# Allegro board PMOD2BNC.brd
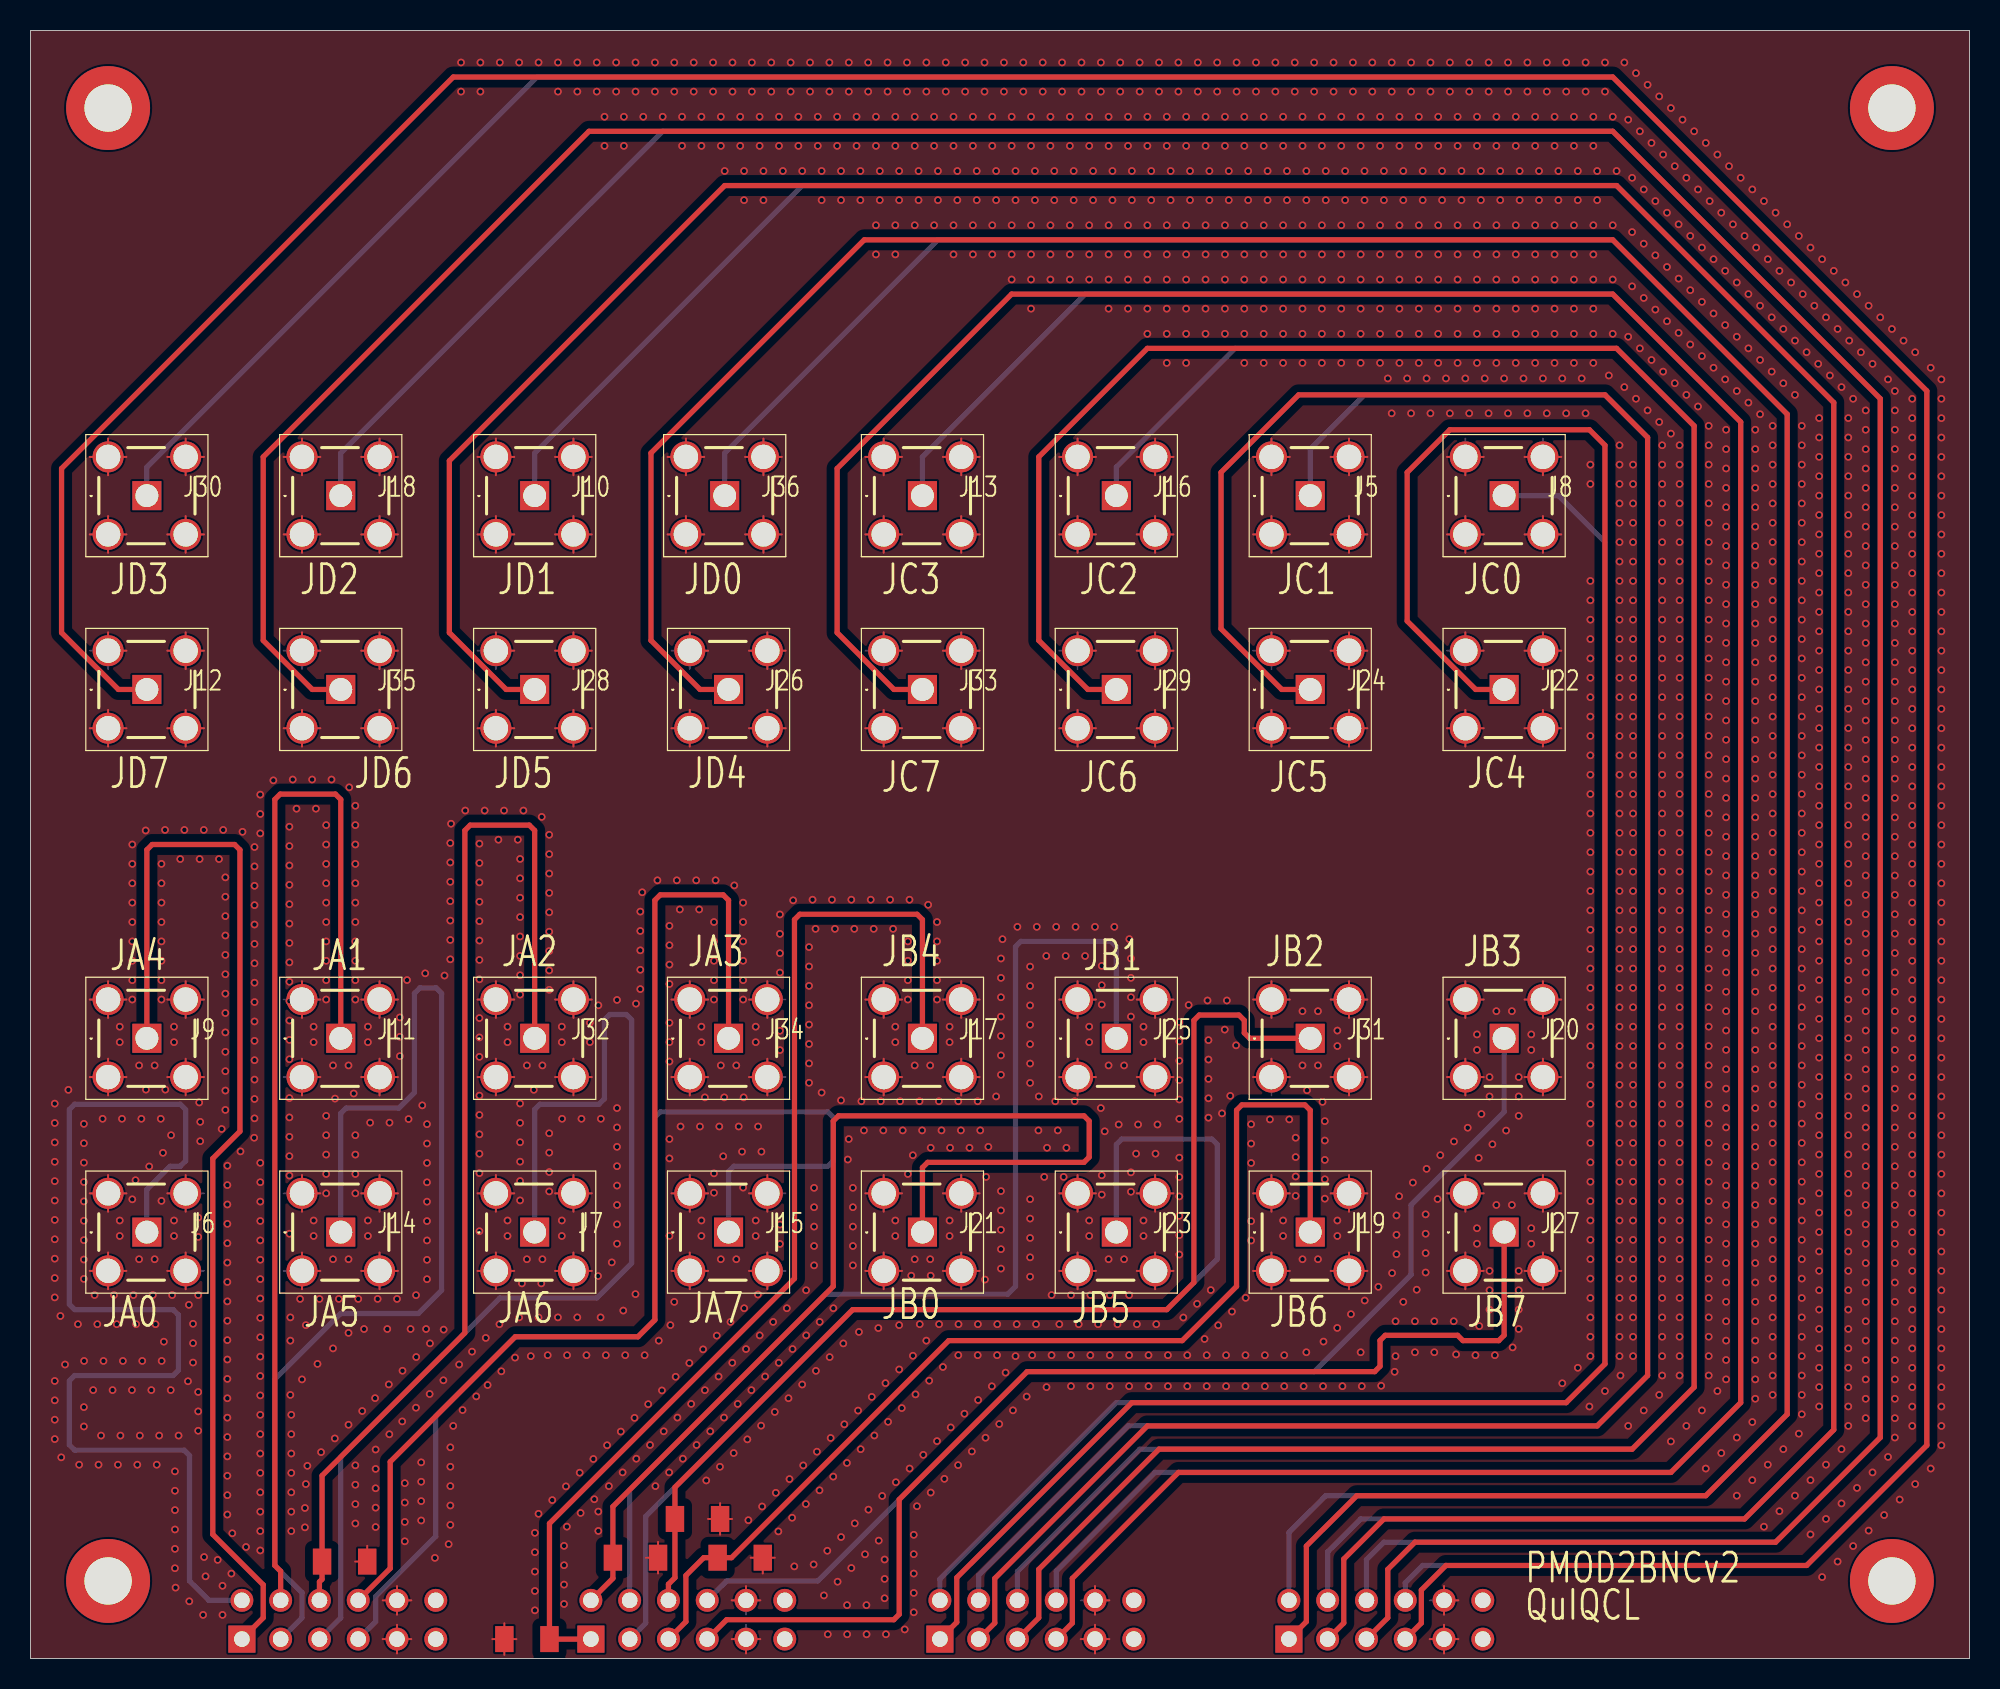
[diagram p0: board, top side]
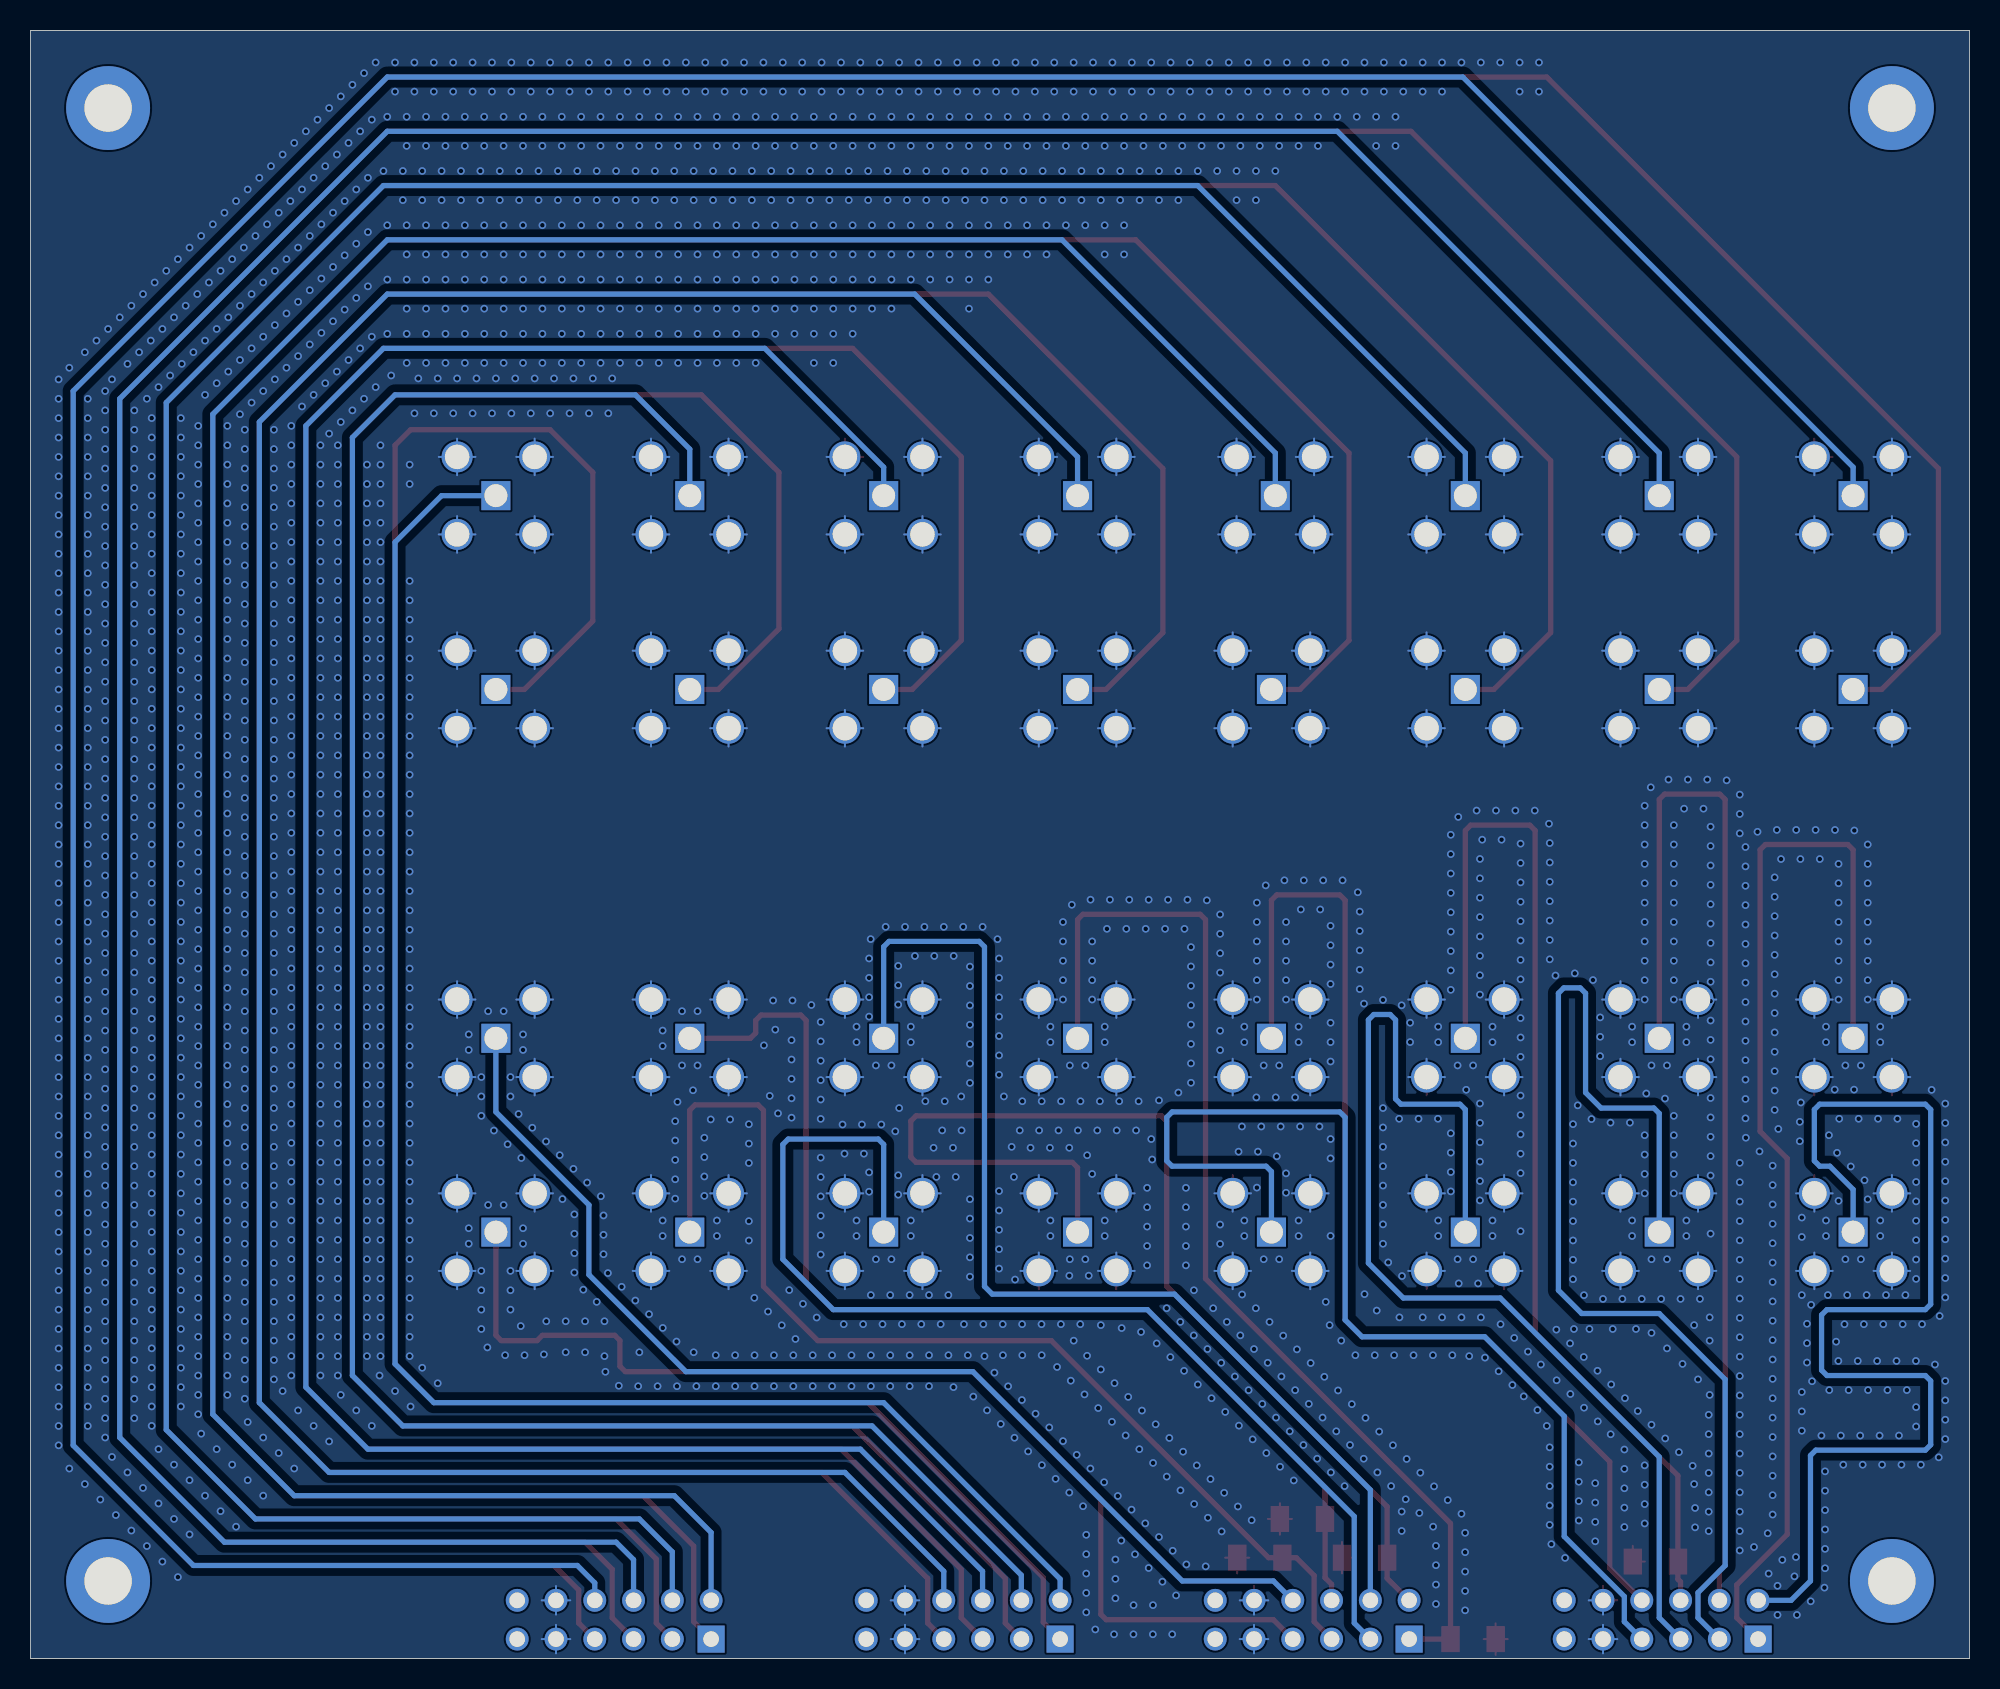
[diagram p1: board, bottom side, seen from below]

Outline 127 x 106.68 mm; copper layers: TOP, LAYER_1, LAYER_2, BOTTOM. Coordinates in mm from the lower left corner of the outline.
Outline path: 0,106.68 127,106.68 127,0 0,0 0,106.68

## Design rules (mm)
constraint set DEFAULT: min track width 0.127
net group IMPORTANT: nets JA_0 JA_1 JA_2 JA_3 JA_4 JA_5 JA_6 JA_7 JB_0 JB_1 JB_2 JB_3 JB_4 JB_5 JB_6 JB_7

## Placement (name value [footprint] x y rotation side)
J1  -  [PZ254R-12-12P]  20.19 2.54 0 top
J2  -  [PZ254R-12-12P]  65.91 2.54 0 top
J3  -  [PZ254R-12-12P]  43.05 2.54 0 top
J4  -  [PZ254R-12-12P]  88.77 2.54 0 top
J5  -  [SMA-KE-10]  83.82 76.2 0 top
J6  -  [SMA-KE-10]  7.62 27.94 0 top
J7  -  [SMA-KE-10]  33.02 27.94 0 top
J8  -  [SMA-KE-10]  96.52 76.2 0 top
J9  -  [SMA-KE-10]  7.62 40.64 0 top
J10  -  [SMA-KE-10]  33.02 76.2 0 top
J11  -  [SMA-KE-10]  20.32 40.64 0 top
J12  -  [SMA-KE-10]  7.62 63.5 0 top
J13  -  [SMA-KE-10]  58.42 76.2 0 top
J14  -  [SMA-KE-10]  20.32 27.94 0 top
J15  -  [SMA-KE-10]  45.72 27.94 0 top
J16  -  [SMA-KE-10]  71.12 76.2 0 top
J17  -  [SMA-KE-10]  58.42 40.64 0 top
J18  -  [SMA-KE-10]  20.32 76.2 0 top
J19  -  [SMA-KE-10]  83.82 27.94 0 top
J20  -  [SMA-KE-10]  96.52 40.64 0 top
J21  -  [SMA-KE-10]  58.42 27.94 0 top
J22  -  [SMA-KE-10]  96.52 63.5 0 top
J23  -  [SMA-KE-10]  71.12 27.94 0 top
J24  -  [SMA-KE-10]  83.82 63.5 0 top
J25  -  [SMA-KE-10]  71.12 40.64 0 top
J26  -  [SMA-KE-10]  45.72 63.5 0 top
J27  -  [SMA-KE-10]  96.52 27.94 0 top
J28  -  [SMA-KE-10]  33.02 63.5 0 top
J29  -  [SMA-KE-10]  71.12 63.5 0 top
J30  -  [SMA-KE-10]  7.62 76.2 0 top
J31  -  [SMA-KE-10]  83.82 40.64 0 top
J32  -  [SMA-KE-10]  33.02 40.64 0 top
J33  -  [SMA-KE-10]  58.42 63.5 0 top
J34  -  [SMA-KE-10]  45.72 40.64 0 top
J35  -  [SMA-KE-10]  20.32 63.5 0 top
J36  -  [SMA-KE-10]  45.47 76.2 0 top
NOREF  -  [unnamed]  121.92 101.6 0 top
NOREF#2  -  [unnamed]  5.08 101.6 0 top
NOREF#3  -  [unnamed]  5.08 5.08 0 top
NOREF#4  -  [unnamed]  121.92 5.08 0 top
R1  -  [ARG06BTC49R9]  20.57 6.35 0 top
R2  -  [ARG06BTC49R9]  32.51 1.27 180 top
R3  -  [ARG06BTC49R9]  39.62 6.6 0 top
R4  -  [ARG06BTC49R9]  46.48 6.6 0 top
R5  -  [ARG06BTC49R9]  43.69 9.14 0 top

## Library data of the parts
J1-J4 = PZ254R-12-12P
J5-J36 = SMA-KE-10
R1-R5 = ARG06BTC49R9_0

## Footprints (pads in the part's own frame, mm; a bottom-side part is the same pattern mirrored in y, then rotated)
ARG06BTC49R9
  rect 1.206x1.702 smd: 1(1.478,0) 2(-1.478,0)
PZ254R-12-12P
  rect 1.778x1.778 hole 1.021: 1(-6.35,-1.27)
  round 1.501 hole 1.021: 2(-6.35,1.27) 3(-3.81,-1.27) 4(-3.81,1.27) 5(-1.27,-1.27) 6(-1.27,1.27) 7(1.27,-1.27) 8(1.27,1.27) 9(3.81,-1.27) 10(3.81,1.27) 11(6.35,-1.27) 12(6.35,1.27)
SMA-KE-10
  round 2.032 hole 1.6: 1(2.54,2.54) 2(-2.54,2.54) 3(-2.54,-2.54) 4(2.54,-2.54)
  rect 1.905x1.905 hole 1.501: 5(0,0)
unnamed
  round 5.499 hole 3.099 unplated: (0,0)

## Nets
GND: J1.9 J1.10 J2.9 J2.10 J3.9 J3.10 J4.9 J4.10 J5.1 J5.2 J5.3 J5.4 J6.1 J6.2 J6.3 J6.4 J7.1 J7.2 J7.3 J7.4 J8.1 J8.2 J8.3 J8.4 J9.1 J9.2 J9.3 J9.4 J10.1 J10.2 J10.3 J10.4 J11.1 J11.2 J11.3 J11.4 J12.1 J12.2 J12.3 J12.4 J13.1 J13.2 J13.3 J13.4 J14.1 J14.2 J14.3 J14.4 J15.1 J15.2 J15.3 J15.4 J16.1 J16.2 J16.3 J16.4 J17.1 J17.2 J17.3 J17.4 J18.1 J18.2 J18.3 J18.4 J19.1 J19.2 J19.3 J19.4 J20.1 J20.2 J20.3 J20.4 J21.1 J21.2 J21.3 J21.4 J22.1 J22.2 J22.3 J22.4 J23.1 J23.2 J23.3 J23.4 J24.1 J24.2 J24.3 J24.4 J25.1 J25.2 J25.3 J25.4 J26.1 J26.2 J26.3 J26.4 J27.1 J27.2 J27.3 J27.4 J28.1 J28.2 J28.3 J28.4 J29.1 J29.2 J29.3 J29.4 J30.1 J30.2 J30.3 J30.4 J31.1 J31.2 J31.3 J31.4 J32.1 J32.2 J32.3 J32.4 J33.1 J33.2 J33.3 J33.4 J34.1 J34.2 J34.3 J34.4 J35.1 J35.2 J35.3 J35.4 J36.1 J36.2 J36.3 J36.4 R1.1 R2.1 R3.1 R4.1 R5.1
JA_0: J1.2 J6.5(IO)
JA_1: J1.4 J11.5(IO)
JA_2: J1.6 J32.5(IO) R1.2
JA_3: J1.8 J34.5(IO)
JA_4: J1.1 J9.5(IO)
JA_5: J1.3 J14.5(IO)
JA_6: J1.5 J7.5(IO)
JA_7: J1.7 J15.5(IO)
JB_0: J3.2 J21.5(IO) R3.2
JB_1: J3.4 J25.5(IO)
JB_2: J3.6 J31.5(IO) R5.2
JB_3: J3.8 J20.5(IO)
JB_4: J3.1 J17.5(IO) R2.2
JB_5: J3.3 J23.5(IO)
JB_6: J3.5 J19.5(IO) R4.2
JB_7: J3.7 J27.5(IO)
JC_0: J2.2 J8.5(IO)
JC_1: J2.4 J5.5(IO)
JC_2: J2.6 J16.5(IO)
JC_3: J2.8 J13.5(IO)
JC_4: J2.1 J22.5(IO)
JC_5: J2.3 J24.5(IO)
JC_6: J2.5 J29.5(IO)
JC_7: J2.7 J33.5(IO)
JD_0: J4.2 J36.5(IO)
JD_1: J4.4 J10.5(IO)
JD_2: J4.6 J18.5(IO)
JD_3: J4.8 J30.5(IO)
JD_4: J4.1 J26.5(IO)
JD_5: J4.3 J28.5(IO)
JD_6: J4.5 J35.5(IO)
JD_7: J4.7 J12.5(IO)

Pads without a net: J1 11 12; J2 11 12; J3 11 12; J4 11 12

## Via types
v1: diameter 0.5, hole 0.3, TOP to BOTTOM, 2518 vias

## Routing (per net, layer and track width the routed paths; a pad name or vN(x,y) marks a point on that pad's centre or on a via; arc(x,y) is an arc through that point)
GND: length 2532.6
  TOP w0.127: 55.88,41.98 J17.2 ; J17.2 54.68,43.18 ; J17.2 55.88,44.38 ; J17.2 57.08,43.18 ; 45.93,1.27 J3.9 ; J3.9 47.8,1.27 ; J3.9 46.86,0.34 ; 93.98,41.98 J20.2 ; J20.2 92.78,43.18 ; J20.2 93.98,44.38 ; J20.2 95.18,43.18 ; 55.88,29.28 J21.2 ; J21.2 54.68,30.48 ; J21.2 57.08,30.48 ; J21.2 55.88,31.68 ; 55.88,36.9 J17.3 ; J17.3 55.88,39.3 ; J17.3 54.68,38.1 ; J17.3 57.08,38.1 ; 59.76,38.1 J17.4 ; J17.4 62.16,38.1 ; J17.4 60.96,36.9 ; J17.4 60.96,39.3 ; 92.78,25.4 J27.3 ; J27.3 93.98,24.2 ; J27.3 95.18,25.4 ; J27.3 93.98,26.6 ; 67.38,60.96 J29.3 ; J29.3 68.58,59.76 ; J29.3 68.58,62.16 ; J29.3 69.78,60.96 ; J8.1 100.26,78.74 ; J8.1 99.06,77.54 ; J8.1 97.86,78.74 ; 97.86,25.4 J27.4 ; J27.4 99.06,24.2 ; J27.4 99.06,26.6 ; J27.4 100.26,25.4 ; 47.06,66.04 J26.1 ; J26.1 49.46,66.04 ; J26.1 48.26,67.24 ; J26.1 48.26,64.84 ; J7.3 31.68,25.4 ; J7.3 29.28,25.4 ; J7.3 30.48,26.6 ; J7.3 30.48,24.2 ; J32.1 35.56,44.38 ; J32.1 34.36,43.18 ; J32.1 36.76,43.18 ; J32.1 35.56,41.98 ; J7.2 30.48,31.68 ; J7.2 29.28,30.48 ; J7.2 30.48,29.28 ; J7.2 31.68,30.48 ; 54.68,73.66 J13.3 ; J13.3 57.08,73.66 ; J13.3 55.88,72.46 ; J13.3 55.88,74.86 ; 97.86,60.96 J22.4 ; J22.4 99.06,62.16 ; J22.4 99.06,59.76 ; J22.4 100.26,60.96 ; J18.1 24.06,78.74 ; J18.1 22.86,79.94 ; J18.1 21.66,78.74 ; J18.1 22.86,77.54 ; 10.16,64.84 J12.1 ; J12.1 10.16,67.24 ; J12.1 8.96,66.04 ; J12.1 11.36,66.04 ; 29.28,38.1 J32.3 ; J32.3 31.68,38.1 ; J32.3 30.48,36.9 ; J32.3 30.48,39.3 ; J12.4 10.16,62.16 ; J12.4 8.96,60.96 ; J12.4 11.36,60.96 ; J12.4 10.16,59.76 ; 29.28,43.18 J32.2 ; J32.2 30.48,44.38 ; J32.2 30.48,41.98 ; J32.2 31.68,43.18 ; 41.98,25.4 J15.3 ; J15.3 43.18,26.6 ; J15.3 43.18,24.2 ; J15.3 44.38,25.4 ; 72.46,78.74 J16.1 ; J16.1 73.66,77.54 ; J16.1 74.86,78.74 ; J16.1 73.66,79.94 ; J35.3 17.78,62.16 ; J35.3 16.58,60.96 ; J35.3 17.78,59.76 ; J35.3 18.98,60.96 ; J15.2 43.18,31.68 ; J15.2 41.98,30.48 ; J15.2 43.18,29.28 ; J15.2 44.38,30.48 ; 81.28,77.54 J5.2 ; J5.2 81.28,79.94 ; J5.2 80.08,78.74 ; J5.2 82.48,78.74 ; J4.10 92.58,4.74 ; J4.10 92.58,2.88 ; J4.10 93.52,3.81 ; 92.78,73.66 J8.3 ; J8.3 93.98,72.46 ; J8.3 95.18,73.66 ; J8.3 93.98,74.86 ; 18.98,66.04 J35.2 17.78,67.24 ; 35.56,59.76 J28.4 ; J28.4 36.76,60.96 ; J28.4 35.56,62.16 ; J28.4 34.36,60.96 ; J9.4 10.16,39.3 ; J9.4 8.96,38.1 ; J9.4 11.36,38.1 ; J9.4 10.16,36.9 ; J29.1 74.86,66.04 ; J29.1 72.46,66.04 ; J29.1 73.66,67.24 ; J29.1 73.66,64.84 ; 86.36,36.9 J31.4 ; J31.4 87.56,38.1 ; J31.4 86.36,39.3 ; J31.4 85.16,38.1 ; J27.2 93.98,31.68 ; J27.2 92.78,30.48 ; J27.2 93.98,29.28 ; J27.2 95.18,30.48 ; 86.36,77.54 J5.1 ; J5.1 87.56,78.74 ; J5.1 85.16,78.74 ; J5.1 86.36,79.94 ; 72.46,38.1 J25.4 ; J25.4 73.66,36.9 ; J25.4 74.86,38.1 ; J25.4 73.66,39.3 ; 48.01,72.46 J36.4 ; J36.4 49.2,73.66 ; J36.4 48.01,74.86 ; J36.4 46.81,73.66 ; J25.1 73.66,44.38 ; J25.1 73.66,41.98 ; J25.1 74.86,43.18 ; J25.1 72.46,43.18 ; J23.3 69.78,25.4 ; J23.3 68.58,24.2 ; J23.3 67.38,25.4 ; J23.3 68.58,26.6 ; 21.66,30.48 J14.1 ; J14.1 22.86,31.68 ; J14.1 24.06,30.48 ; J14.1 22.86,29.28 ; J19.3 82.48,25.4 ; J19.3 81.28,26.6 ; J19.3 81.28,24.2 ; J19.3 80.08,25.4 ; J26.4 48.26,62.16 ; J26.4 49.46,60.96 ; J26.4 48.26,59.76 ; J26.4 47.06,60.96 ; 59.76,66.04 J33.1 ; J33.1 62.16,66.04 ; J33.1 60.96,67.24 ; J33.1 60.96,64.84 ; J1.10 24,4.74 ; J1.10 24.94,3.81 ; J1.10 24,2.88 ; J1.10 23.07,3.81 ; J8.2 95.18,78.74 ; J8.2 92.78,78.74 ; J8.2 93.98,77.54 ; 67.38,38.1 J25.3 ; J25.3 69.78,38.1 ; J25.3 68.58,39.3 ; J25.3 68.58,36.9 ; 41.98,38.1 J34.3 ; J34.3 43.18,36.9 ; J34.3 44.38,38.1 ; J34.3 43.18,39.3 ; 44.38,66.04 J26.2 43.18,67.24 ; 60.96,77.54 J13.1 ; J13.1 59.76,78.74 ; J13.1 62.16,78.74 ; J13.1 60.96,79.94 ; J10.2 31.68,78.74 ; J10.2 30.48,79.94 ; J10.2 29.28,78.74 ; J10.2 30.48,77.54 ; J25.2 69.78,43.18 ; J25.2 68.58,44.38 ; J25.2 68.58,41.98 ; J25.2 67.38,43.18 ; J29.4 73.66,62.16 ; J29.4 72.46,60.96 ; J29.4 73.66,59.76 ; J29.4 74.86,60.96 ; J21.1 60.96,31.68 ; J21.1 60.96,29.28 ; J21.1 59.76,30.48 ; J21.1 62.16,30.48 ; 72.46,30.48 J23.1 ; J23.1 73.66,31.68 ; J23.1 74.86,30.48 ; J23.1 73.66,29.28 ; 35.56,77.54 J10.1 ; J10.1 35.56,79.94 ; J10.1 36.76,78.74 ; J10.1 34.36,78.74 ; J31.1 86.36,44.38 ; J31.1 85.16,43.18 ; J31.1 87.56,43.18 ; J31.1 86.36,41.98 ; J11.4 22.86,39.3 ; J11.4 22.86,36.9 ; J11.4 24.06,38.1 ; J11.4 21.66,38.1 ; 8.96,30.48 J6.1 ; J6.1 10.16,29.28 ; J6.1 10.16,31.68 ; 17.78,29.28 J14.2 ; J14.2 17.78,31.68 ; J14.2 18.98,30.48 ; J30.2 5.08,79.94 ; J30.2 5.08,77.54 ; J30.2 3.88,78.74 ; J30.2 6.28,78.74 ; 21.66,43.18 J11.1 ; J11.1 22.86,41.98 ; J11.1 24.06,43.18 ; J11.1 22.86,44.38 ; J11.3 18.98,38.1 ; J11.3 17.78,39.3 ; J11.3 17.78,36.9 ; 17.78,72.46 J18.3 ; J18.3 17.78,74.86 ; J18.3 16.58,73.66 ; J18.3 18.98,73.66 ; R5.1 45.17,10.18 ; R5.1 45.95,9.14 ; R5.1 45.17,8.11 ; R5.1 44.38,9.14 ; 41.73,78.74 J36.2 ; J36.2 44.12,78.74 ; J36.2 42.93,77.54 ; J36.2 42.93,79.94 ; J32.4 35.56,39.3 ; J32.4 34.36,38.1 ; J32.4 36.76,38.1 ; J32.4 35.56,36.9 ; J30.3 5.08,74.86 ; J30.3 6.28,73.66 ; J30.3 5.08,72.46 ; J30.3 3.88,73.66 ; 29.28,60.96 J28.3 ; J28.3 30.48,59.76 ; J28.3 30.48,62.16 ; J28.3 31.68,60.96 ; 8.96,73.66 J30.4 ; J30.4 10.16,74.86 ; J30.4 10.16,72.46 ; J30.4 11.36,73.66 ; 80.08,43.18 J31.2 ; J31.2 81.28,41.98 ; J31.2 82.48,43.18 ; J31.2 81.28,44.38 ; J10.3 31.68,73.66 ; J10.3 29.28,73.66 ; J10.3 30.48,72.46 ; J10.3 30.48,74.86 ; J23.4 73.66,26.6 ; J23.4 73.66,24.2 ; J23.4 74.86,25.4 ; J23.4 72.46,25.4 ; J22.3 95.18,60.96 ; J22.3 92.78,60.96 ; J22.3 93.98,59.76 ; J22.3 93.98,62.16 ; 41.98,60.96 J26.3 ; J26.3 44.38,60.96 ; J26.3 43.18,59.76 ; J26.3 43.18,62.16 ; 21.66,73.66 J18.4 ; J18.4 24.06,73.66 ; J18.4 22.86,74.86 ; J18.4 22.86,72.46 ; J34.1 48.26,44.38 ; J34.1 47.06,43.18 ; J34.1 48.26,41.98 ; 3.88,43.18 J9.2 ; J9.2 5.08,44.38 ; J9.2 6.28,43.18 ; J9.2 5.08,41.98 ; J19.2 82.48,30.48 ; J19.2 81.28,29.28 ; J19.2 81.28,31.68 ; J19.2 80.08,30.48 ; J13.4 60.96,74.86 ; J13.4 60.96,72.46 ; J13.4 62.16,73.66 ; J13.4 59.76,73.66 ; 68.58,77.54 J16.2 ; J16.2 67.38,78.74 ; J16.2 69.78,78.74 ; J16.2 68.58,79.94 ; J33.4 62.16,60.96 ; J33.4 60.96,59.76 ; J33.4 59.76,60.96 ; J33.4 60.96,62.16 ; J6.2 5.08,31.68 ; J6.2 3.88,30.48 ; J6.2 5.08,29.28 ; J6.2 6.28,30.48 ; J14.3 18.98,25.4 ; J14.3 17.78,24.2 ; J14.3 17.78,26.6 ; J4.9 93.52,1.27 ; J4.9 91.65,1.27 ; J4.9 92.58,2.2 ; J4.9 92.58,0.34 ; J10.4 35.56,74.86 ; J10.4 36.76,73.66 ; J10.4 35.56,72.46 ; J10.4 34.36,73.66 ; J1.9 24,2.2 ; J1.9 23.07,1.27 ; J1.9 24.94,1.27 ; J1.9 24,0.34 ; J27.1 100.26,30.48 ; J27.1 99.06,31.68 ; J27.1 97.86,30.48 ; J27.1 99.06,29.28 ; 10.16,41.98 J9.1 ; J9.1 8.96,43.18 ; J9.1 10.16,44.38 ; J9.1 11.36,43.18 ; 47.06,25.4 J15.4 ; J15.4 48.26,26.6 ; J15.4 48.26,24.2 ; 99.06,72.46 J8.4 ; J8.4 99.06,74.86 ; J8.4 97.86,73.66 ; J8.4 100.26,73.66 ; 85.16,73.66 J5.4 ; J5.4 86.36,72.46 ; J5.4 87.56,73.66 ; J5.4 86.36,74.86 ; 21.66,66.04 J35.1 ; J35.1 24.06,66.04 ; J35.1 22.86,64.84 ; J35.1 22.86,67.24 ; J5.3 82.48,73.66 ; J5.3 80.08,73.66 ; J5.3 81.28,72.46 ; J5.3 81.28,74.86 ; 99.06,41.98 J20.1 ; J20.1 99.06,44.38 ; J20.1 100.26,43.18 ; J20.1 97.86,43.18 ; J2.9 69.72,2.2 ; J2.9 70.66,1.27 ; J2.9 68.79,1.27 ; J2.9 69.72,0.34 ; 54.68,78.74 J13.2 ; J13.2 55.88,79.94 ; J13.2 57.08,78.74 ; J13.2 55.88,77.54 ; 55.88,24.2 J21.3 ; J21.3 55.88,26.6 ; J21.3 54.68,25.4 ; J21.3 57.08,25.4 ; 22.05,7.38 R1.1 21.26,6.35 ; J19.1 86.36,31.68 ; J19.1 87.56,30.48 ; J19.1 86.36,29.28 ; J19.1 85.16,30.48 ; 48.26,36.9 J34.4 ; J34.4 48.26,39.3 ; J34.4 47.06,38.1 ; 68.58,72.46 J16.3 ; J16.3 69.78,73.66 ; J16.3 68.58,74.86 ; J16.3 67.38,73.66 ; R2.1 31.03,2.3 ; R2.1 31.03,0.24 ; R2.1 31.82,1.27 ; R2.1 30.25,1.27 ; 93.98,67.24 J22.2 95.18,66.04 ; 34.36,30.48 J7.1 ; J7.1 35.56,31.68 ; J7.1 36.76,30.48 ; J7.1 35.56,29.28 ; J36.3 42.93,74.86 ; J36.3 41.73,73.66 ; J36.3 44.12,73.66 ; J36.3 42.93,72.46 ; 48.26,29.28 J15.1 ; J15.1 48.26,31.68 ; J15.1 47.06,30.48 ; 5.08,36.9 J9.3 ; J9.3 6.28,38.1 ; J9.3 3.88,38.1 ; J9.3 5.08,39.3 ; J24.1 87.56,66.04 ; J24.1 86.36,67.24 ; J24.1 85.16,66.04 ; J24.1 86.36,64.84 ; 5.08,24.2 J6.3 ; J6.3 6.28,25.4 ; J6.3 3.88,25.4 ; J6.3 5.08,26.6 ; 41.1,5.57 R3.1 ; R3.1 40.31,6.6 ; R3.1 41.1,7.64 ; 97.86,38.1 J20.4 ; J20.4 99.06,39.3 ; J20.4 100.26,38.1 ; J20.4 99.06,36.9 ; 97.86,66.04 J22.1 ; J22.1 99.06,67.24 ; J22.1 99.06,64.84 ; J22.1 100.26,66.04 ; J34.2 43.18,44.38 ; J34.2 41.98,43.18 ; J34.2 44.38,43.18 ; J34.2 43.18,41.98 ; 5.08,59.76 J12.3 ; J12.3 5.08,62.16 ; J12.3 3.88,60.96 ; J12.3 6.28,60.96 ; J20.3 93.98,39.3 ; J20.3 92.78,38.1 ; J20.3 95.18,38.1 ; J20.3 93.98,36.9 ; J6.4 10.16,26.6 ; J6.4 8.96,25.4 ; J6.4 10.16,24.2 ; 47.96,5.57 R4.1 ; R4.1 47.17,6.6 ; R4.1 48.75,6.6 ; 21.66,25.4 J14.4 ; J14.4 24.06,25.4 ; J14.4 22.86,26.6 ; J14.4 22.86,24.2 ; 35.56,24.2 J7.4 ; J7.4 35.56,26.6 ; J7.4 36.76,25.4 ; J7.4 34.36,25.4 ; J11.2 18.98,43.18 ; J11.2 17.78,44.38 ; J11.2 17.78,41.98 ; 46.81,78.74 J36.1 ; J36.1 48.01,79.94 ; J36.1 48.01,77.54 ; J36.1 49.2,78.74 ; J35.4 22.86,62.16 ; J35.4 24.06,60.96 ; J35.4 22.86,59.76 ; J35.4 21.66,60.96 ; J33.3 55.88,62.16 ; J33.3 54.68,60.96 ; J33.3 55.88,59.76 ; J33.3 57.08,60.96 ; J18.2 18.98,78.74 ; J18.2 17.78,79.94 ; J18.2 17.78,77.54 ; J18.2 16.58,78.74 ; 59.76,25.4 J21.4 ; J21.4 60.96,26.6 ; J21.4 60.96,24.2 ; J21.4 62.16,25.4 ; J23.2 69.78,30.48 ; J23.2 67.38,30.48 ; J23.2 68.58,29.28 ; J23.2 68.58,31.68 ; 5.08,67.24 J12.2 6.28,66.04 ; J24.4 86.36,62.16 ; J24.4 86.36,59.76 ; J24.4 85.16,60.96 ; J24.4 87.56,60.96 ; J2.10 69.72,4.74 ; J2.10 70.66,3.81 ; J2.10 69.72,2.88 ; 85.16,25.4 J19.4 ; J19.4 86.36,24.2 ; J19.4 87.56,25.4 ; J19.4 86.36,26.6 ; J28.1 35.56,67.24 ; J28.1 34.36,66.04 ; J28.1 36.76,66.04 ; J28.1 35.56,64.84 ; 30.48,67.24 J28.2 31.68,66.04 ; J17.1 60.96,44.38 ; J17.1 59.76,43.18 ; J17.1 60.96,41.98 ; J17.1 62.16,43.18 ; 69.78,66.04 J29.2 68.58,67.24 ; 10.16,77.54 J30.1 ; J30.1 11.36,78.74 ; J30.1 10.16,79.94 ; J30.1 8.96,78.74 ; 73.66,72.46 J16.4 ; J16.4 74.86,73.66 ; J16.4 73.66,74.86 ; J16.4 72.46,73.66 ; J3.10 47.8,3.81 ; J3.10 46.86,4.74 ; J3.10 45.93,3.81 ; J31.3 82.48,38.1 ; J31.3 81.28,39.3 ; J31.3 80.08,38.1 ; 57.08,66.04 J33.2 55.88,67.24 ; 82.48,66.04 J24.2 81.28,67.24 ; J24.3 81.28,62.16 ; J24.3 81.28,59.76 ; J24.3 80.08,60.96 ; J24.3 82.48,60.96
  LAYER_1 w0.127: 22.86,41.98 J11.1 ; J11.1 21.66,43.18 ; J11.1 24.06,43.18 ; J11.1 22.86,44.38 ; J35.4 24.06,60.96 ; J35.4 22.86,62.16 ; J35.4 21.66,60.96 ; J35.4 22.86,59.76 ; 21.66,73.66 J18.4 ; J18.4 24.06,73.66 ; J18.4 22.86,72.46 ; J18.4 22.86,74.86 ; 8.96,38.1 J9.4 ; J9.4 10.16,39.3 ; J9.4 11.36,38.1 ; J9.4 10.16,36.9 ; 34.36,43.18 J32.1 ; J32.1 35.56,41.98 ; J32.1 36.76,43.18 ; J32.1 35.56,44.38 ; J13.3 55.88,74.86 ; J13.3 57.08,73.66 ; J13.3 55.88,72.46 ; J13.3 54.68,73.66 ; 17.78,36.9 J11.3 ; J11.3 17.78,39.3 ; J11.3 16.58,38.1 ; J11.3 18.98,38.1 ; 69.72,2.88 J2.10 ; J2.10 68.79,3.81 ; J2.10 69.72,4.74 ; J2.10 70.66,3.81 ; J6.2 6.28,30.48 ; J6.2 5.08,29.28 ; J6.2 5.08,31.68 ; J6.2 3.88,30.48 ; 68.58,36.9 J25.3 ; J25.3 68.58,39.3 ; J25.3 67.38,38.1 ; J25.3 69.78,38.1 ; 55.88,59.76 J33.3 ; J33.3 57.08,60.96 ; J33.3 55.88,62.16 ; J33.3 54.68,60.96 ; 16.58,25.4 J14.3 ; J14.3 17.78,24.2 ; J14.3 17.78,26.6 ; J14.3 18.98,25.4 ; J9.3 6.28,38.1 ; J9.3 3.88,38.1 ; J9.3 5.08,39.3 ; J9.3 5.08,36.9 ; 30.48,36.9 J32.3 ; J32.3 31.68,38.1 ; J32.3 29.28,38.1 ; J32.3 30.48,39.3 ; 55.88,77.54 J13.2 ; J13.2 55.88,79.94 ; J13.2 54.68,78.74 ; J13.2 57.08,78.74 ; J20.3 93.98,39.3 ; J20.3 92.78,38.1 ; J20.3 95.18,38.1 ; J20.3 93.98,36.9 ; 72.46,73.66 J16.4 ; J16.4 73.66,74.86 ; J16.4 73.66,72.46 ; J16.4 74.86,73.66 ; 93.98,77.54 J8.2 ; J8.2 92.78,78.74 ; J8.2 93.98,79.94 ; J8.2 95.18,78.74 ; J16.3 68.58,74.86 ; J16.3 68.58,72.46 ; J16.3 67.38,73.66 ; J16.3 69.78,73.66 ; J27.3 95.18,25.4 ; J27.3 93.98,24.2 ; J27.3 92.78,25.4 ; J27.3 93.98,26.6 ; 54.68,43.18 J17.2 ; J17.2 55.88,44.38 ; J17.2 55.88,41.98 ; J17.2 57.08,43.18 ; J19.2 81.28,31.68 ; J19.2 81.28,29.28 ; J19.2 80.08,30.48 ; J19.2 82.48,30.48 ; J20.2 93.98,44.38 ; J20.2 95.18,43.18 ; J20.2 92.78,43.18 ; J20.2 93.98,41.98 ; J14.4 22.86,26.6 ; J14.4 22.86,24.2 ; J14.4 24.06,25.4 ; J14.4 21.66,25.4 ; 69.72,0.34 J2.9 ; J2.9 70.66,1.27 ; J2.9 68.79,1.27 ; J2.9 69.72,2.2 ; J31.3 81.28,39.3 ; J31.3 81.28,36.9 ; J31.3 80.08,38.1 ; J31.3 82.48,38.1 ; 16.58,66.04 J35.2 ; J35.2 18.98,66.04 ; J35.2 17.78,67.24 ; J35.2 17.78,64.84 ; 67.38,30.48 J23.2 ; J23.2 69.78,30.48 ; J23.2 68.58,31.68 ; J23.2 68.58,29.28 ; J29.1 74.86,66.04 ; J29.1 72.46,66.04 ; J29.1 73.66,67.24 ; J29.1 73.66,64.84 ; 55.88,36.9 J17.3 ; J17.3 57.08,38.1 ; J17.3 54.68,38.1 ; J17.3 55.88,39.3 ; J8.4 100.26,73.66 ; J8.4 97.86,73.66 ; J8.4 99.06,74.86 ; J8.4 99.06,72.46 ; J5.4 86.36,74.86 ; J5.4 85.16,73.66 ; J5.4 87.56,73.66 ; J5.4 86.36,72.46 ; 54.68,30.48 J21.2 ; J21.2 55.88,29.28 ; J21.2 55.88,31.68 ; J21.2 57.08,30.48 ; J6.1 11.36,30.48 ; J6.1 10.16,31.68 ; J6.1 10.16,29.28 ; J6.1 8.96,30.48 ; 73.66,29.28 J23.1 ; J23.1 74.86,30.48 ; J23.1 72.46,30.48 ; J23.1 73.66,31.68 ; 23.07,3.81 J1.10 ; J1.10 24.94,3.81 ; J1.10 24,2.88 ; J1.10 24,4.74 ; J6.4 11.36,25.4 ; J6.4 8.96,25.4 ; J6.4 10.16,26.6 ; J6.4 10.16,24.2 ; J32.4 35.56,39.3 ; J32.4 36.76,38.1 ; J32.4 34.36,38.1 ; J32.4 35.56,36.9 ; 35.56,64.84 J28.1 ; J28.1 36.76,66.04 ; J28.1 35.56,67.24 ; J28.1 34.36,66.04 ; J33.1 60.96,67.24 ; J33.1 60.96,64.84 ; J33.1 62.16,66.04 ; J33.1 59.76,66.04 ; J22.2 95.18,66.04 ; J22.2 93.98,67.24 ; J22.2 92.78,66.04 ; J22.2 93.98,64.84 ; 22.86,36.9 J11.4 ; J11.4 22.86,39.3 ; J11.4 21.66,38.1 ; J11.4 24.06,38.1 ; 85.16,30.48 J19.1 ; J19.1 87.56,30.48 ; J19.1 86.36,29.28 ; J19.1 86.36,31.68 ; 86.36,77.54 J5.1 ; J5.1 86.36,79.94 ; J5.1 85.16,78.74 ; J5.1 87.56,78.74 ; J36.4 48.01,74.86 ; J36.4 48.01,72.46 ; J36.4 49.2,73.66 ; J36.4 46.81,73.66 ; J23.3 68.58,26.6 ; J23.3 68.58,24.2 ; J23.3 69.78,25.4 ; J23.3 67.38,25.4 ; 97.86,30.48 J27.1 ; J27.1 99.06,29.28 ; J27.1 100.26,30.48 ; J27.1 99.06,31.68 ; J30.2 5.08,79.94 ; J30.2 6.28,78.74 ; J30.2 5.08,77.54 ; J30.2 3.88,78.74 ; J10.2 30.48,79.94 ; J10.2 29.28,78.74 ; J10.2 30.48,77.54 ; J10.2 31.68,78.74 ; J7.4 36.76,25.4 ; J7.4 34.36,25.4 ; J7.4 35.56,24.2 ; J7.4 35.56,26.6 ; J12.3 6.28,60.96 ; J12.3 5.08,59.76 ; J12.3 3.88,60.96 ; J12.3 5.08,62.16 ; 59.76,73.66 J13.4 ; J13.4 62.16,73.66 ; J13.4 60.96,72.46 ; J13.4 60.96,74.86 ; J10.3 30.48,74.86 ; J10.3 29.28,73.66 ; J10.3 31.68,73.66 ; J10.3 30.48,72.46 ; 68.58,59.76 J29.3 ; J29.3 69.78,60.96 ; J29.3 68.58,62.16 ; J29.3 67.38,60.96 ; J15.2 44.38,30.48 ; J15.2 43.18,31.68 ; J15.2 41.98,30.48 ; J15.2 43.18,29.28 ; J20.1 99.06,44.38 ; J20.1 100.26,43.18 ; J20.1 97.86,43.18 ; J20.1 99.06,41.98 ; J23.4 73.66,26.6 ; J23.4 74.86,25.4 ; J23.4 72.46,25.4 ; J23.4 73.66,24.2 ; 10.16,41.98 J9.1 ; J9.1 10.16,44.38 ; J9.1 8.96,43.18 ; J9.1 11.36,43.18 ; 67.38,43.18 J25.2 ; J25.2 68.58,44.38 ; J25.2 68.58,41.98 ; J25.2 69.78,43.18 ; J3.10 46.86,4.74 ; J3.10 47.8,3.81 ; J3.10 46.86,2.88 ; J3.10 45.93,3.81 ; J28.3 30.48,62.16 ; J28.3 30.48,59.76 ; J28.3 29.28,60.96 ; J28.3 31.68,60.96 ; 99.06,77.54 J8.1 ; J8.1 97.86,78.74 ; J8.1 100.26,78.74 ; J8.1 99.06,79.94 ; 46.81,78.74 J36.1 ; J36.1 48.01,79.94 ; J36.1 49.2,78.74 ; J36.1 48.01,77.54 ; 60.96,36.9 J17.4 ; J17.4 60.96,39.3 ; J17.4 62.16,38.1 ; J17.4 59.76,38.1 ; J1.9 24,2.2 ; J1.9 24,0.34 ; J1.9 23.07,1.27 ; J1.9 24.94,1.27 ; J15.3 43.18,26.6 ; J15.3 44.38,25.4 ; J15.3 43.18,24.2 ; J15.3 41.98,25.4 ; J16.1 73.66,79.94 ; J16.1 74.86,78.74 ; J16.1 72.46,78.74 ; J16.1 73.66,77.54 ; 35.56,29.28 J7.1 ; J7.1 34.36,30.48 ; J7.1 36.76,30.48 ; J7.1 35.56,31.68 ; J31.2 82.48,43.18 ; J31.2 80.08,43.18 ; J31.2 81.28,44.38 ; J31.2 81.28,41.98 ; 81.28,24.2 J19.3 ; J19.3 82.48,25.4 ; J19.3 80.08,25.4 ; J19.3 81.28,26.6 ; J5.3 82.48,73.66 ; J5.3 80.08,73.66 ; J5.3 81.28,74.86 ; J5.3 81.28,72.46 ; J19.4 86.36,26.6 ; J19.4 85.16,25.4 ; J19.4 86.36,24.2 ; J19.4 87.56,25.4 ; 85.16,66.04 J24.1 ; J24.1 86.36,67.24 ; J24.1 87.56,66.04 ; J24.1 86.36,64.84 ; 97.86,60.96 J22.4 ; J22.4 99.06,62.16 ; J22.4 99.06,59.76 ; J22.4 100.26,60.96 ; 59.76,43.18 J17.1 ; J17.1 60.96,44.38 ; J17.1 62.16,43.18 ; J17.1 60.96,41.98 ; 41.98,43.18 J34.2 ; J34.2 43.18,41.98 ; J34.2 43.18,44.38 ; J34.2 44.38,43.18 ; 41.98,60.96 J26.3 ; J26.3 43.18,59.76 ; J26.3 44.38,60.96 ; J26.3 43.18,62.16 ; J13.1 62.16,78.74 ; J13.1 59.76,78.74 ; J13.1 60.96,79.94 ; J13.1 60.96,77.54 ; J7.3 30.48,26.6 ; J7.3 29.28,25.4 ; J7.3 30.48,24.2 ; J7.3 31.68,25.4 ; 48.26,24.2 J15.4 ; J15.4 48.26,26.6 ; J15.4 49.46,25.4 ; J15.4 47.06,25.4 ; J33.2 55.88,67.24 ; J33.2 55.88,64.84 ; J33.2 54.68,66.04 ; J33.2 57.08,66.04 ; 68.58,77.54 J16.2 ; J16.2 68.58,79.94 ; J16.2 69.78,78.74 ; J16.2 67.38,78.74 ; 99.06,36.9 J20.4 ; J20.4 97.86,38.1 ; J20.4 100.26,38.1 ; J20.4 99.06,39.3 ; 30.48,41.98 J32.2 ; J32.2 29.28,43.18 ; J32.2 31.68,43.18 ; J32.2 30.48,44.38 ; 22.86,77.54 J18.1 ; J18.1 22.86,79.94 ; J18.1 24.06,78.74 ; J18.1 21.66,78.74 ; J25.4 73.66,39.3 ; J25.4 74.86,38.1 ; J25.4 72.46,38.1 ; J25.4 73.66,36.9 ; J11.2 18.98,43.18 ; J11.2 17.78,44.38 ; J11.2 16.58,43.18 ; J11.2 17.78,41.98 ; 55.88,24.2 J21.3 ; J21.3 57.08,25.4 ; J21.3 54.68,25.4 ; J21.3 55.88,26.6 ; 5.08,24.2 J6.3 ; J6.3 6.28,25.4 ; J6.3 3.88,25.4 ; J6.3 5.08,26.6 ; 10.16,77.54 J30.1 ; J30.1 11.36,78.74 ; J30.1 8.96,78.74 ; J30.1 10.16,79.94 ; J31.4 87.56,38.1 ; J31.4 85.16,38.1 ; J31.4 86.36,39.3 ; J31.4 86.36,36.9 ; J36.3 44.12,73.66 ; J36.3 42.93,74.86 ; J36.3 41.73,73.66 ; J36.3 42.93,72.46 ; 47.06,30.48 J15.1 ; J15.1 48.26,31.68 ; J15.1 48.26,29.28 ; J15.1 49.46,30.48 ; J24.2 82.48,66.04 ; J24.2 81.28,64.84 ; J24.2 81.28,67.24 ; J24.2 80.08,66.04 ; 5.08,41.98 J9.2 ; J9.2 6.28,43.18 ; J9.2 3.88,43.18 ; J9.2 5.08,44.38 ; J27.2 93.98,31.68 ; J27.2 95.18,30.48 ; J27.2 93.98,29.28 ; J27.2 92.78,30.48 ; J10.1 35.56,79.94 ; J10.1 34.36,78.74 ; J10.1 36.76,78.74 ; J10.1 35.56,77.54 ; J3.9 47.8,1.27 ; J3.9 46.86,0.34 ; J3.9 45.93,1.27 ; J3.9 46.86,2.2 ; 93.98,72.46 J8.3 ; J8.3 95.18,73.66 ; J8.3 93.98,74.86 ; J8.3 92.78,73.66 ; 59.76,25.4 J21.4 ; J21.4 62.16,25.4 ; J21.4 60.96,24.2 ; J21.4 60.96,26.6 ; J24.4 86.36,62.16 ; J24.4 85.16,60.96 ; J24.4 86.36,59.76 ; J24.4 87.56,60.96 ; J25.1 73.66,44.38 ; J25.1 72.46,43.18 ; J25.1 73.66,41.98 ; J25.1 74.86,43.18 ; J14.2 18.98,30.48 ; J14.2 17.78,29.28 ; J14.2 16.58,30.48 ; J14.2 17.78,31.68 ; 17.78,77.54 J18.2 ; J18.2 16.58,78.74 ; J18.2 17.78,79.94 ; J18.2 18.98,78.74 ; 97.86,66.04 J22.1 ; J22.1 100.26,66.04 ; J22.1 99.06,64.84 ; J22.1 99.06,67.24 ; J18.3 17.78,74.86 ; J18.3 17.78,72.46 ; J18.3 16.58,73.66 ; J18.3 18.98,73.66 ; 48.26,64.84 J26.1 ; J26.1 47.06,66.04 ; J26.1 49.46,66.04 ; J26.1 48.26,67.24 ; 8.96,66.04 J12.1 ; J12.1 11.36,66.04 ; J12.1 10.16,64.84 ; J12.1 10.16,67.24 ; 43.18,36.9 J34.3 ; J34.3 43.18,39.3 ; J34.3 44.38,38.1 ; J34.3 41.98,38.1 ; J5.2 82.48,78.74 ; J5.2 80.08,78.74 ; J5.2 81.28,77.54 ; J5.2 81.28,79.94 ; 92.78,60.96 J22.3 ; J22.3 93.98,59.76 ; J22.3 95.18,60.96 ; J22.3 93.98,62.16 ; 68.58,64.84 J29.2 ; J29.2 67.38,66.04 ; J29.2 69.78,66.04 ; J29.2 68.58,67.24 ; 29.28,66.04 J28.2 ; J28.2 30.48,64.84 ; J28.2 30.48,67.24 ; J28.2 31.68,66.04 ; J31.1 86.36,44.38 ; J31.1 85.16,43.18 ; J31.1 86.36,41.98 ; J31.1 87.56,43.18 ; 5.08,64.84 J12.2 ; J12.2 5.08,67.24 ; J12.2 6.28,66.04 ; J12.2 3.88,66.04 ; J14.1 24.06,30.48 ; J14.1 21.66,30.48 ; J14.1 22.86,31.68 ; J14.1 22.86,29.28 ; 59.76,30.48 J21.1 ; J21.1 60.96,29.28 ; J21.1 60.96,31.68 ; J21.1 62.16,30.48 ; 35.56,59.76 J28.4 ; J28.4 35.56,62.16 ; J28.4 34.36,60.96 ; J28.4 36.76,60.96 ; 99.06,24.2 J27.4 ; J27.4 100.26,25.4 ; J27.4 99.06,26.6 ; J27.4 97.86,25.4 ; J35.1 24.06,66.04 ; J35.1 22.86,64.84 ; J35.1 21.66,66.04 ; J35.1 22.86,67.24 ; 47.06,43.18 J34.1 ; J34.1 49.46,43.18 ; J34.1 48.26,41.98 ; J34.1 48.26,44.38 ; 30.48,29.28 J7.2 ; J7.2 31.68,30.48 ; J7.2 30.48,31.68 ; J7.2 29.28,30.48 ; J12.4 10.16,62.16 ; J12.4 11.36,60.96 ; J12.4 10.16,59.76 ; J12.4 8.96,60.96 ; 47.06,60.96 J26.4 ; J26.4 49.46,60.96 ; J26.4 48.26,59.76 ; J26.4 48.26,62.16 ; J24.3 81.28,62.16 ; J24.3 81.28,59.76 ; J24.3 82.48,60.96 ; J24.3 80.08,60.96 ; 41.73,78.74 J36.2 ; J36.2 42.93,79.94 ; J36.2 44.12,78.74 ; J36.2 42.93,77.54 ; J34.4 49.46,38.1 ; J34.4 48.26,36.9 ; J34.4 47.06,38.1 ; J34.4 48.26,39.3 ; J35.3 18.98,60.96 ; J35.3 17.78,62.16 ; J35.3 17.78,59.76 ; J35.3 16.58,60.96 ; J26.2 43.18,67.24 ; J26.2 41.98,66.04 ; J26.2 43.18,64.84 ; J26.2 44.38,66.04 ; J10.4 36.76,73.66 ; J10.4 35.56,74.86 ; J10.4 35.56,72.46 ; J10.4 34.36,73.66 ; J4.9 92.58,2.2 ; J4.9 92.58,0.34 ; J4.9 93.52,1.27 ; J4.9 91.65,1.27 ; J30.4 11.36,73.66 ; J30.4 10.16,74.86 ; J30.4 10.16,72.46 ; J30.4 8.96,73.66 ; J4.10 93.52,3.81 ; J4.10 92.58,4.74 ; J4.10 92.58,2.88 ; J4.10 91.65,3.81 ; J33.4 62.16,60.96 ; J33.4 59.76,60.96 ; J33.4 60.96,62.16 ; J33.4 60.96,59.76 ; 73.66,59.76 J29.4 ; J29.4 73.66,62.16 ; J29.4 74.86,60.96 ; J29.4 72.46,60.96 ; J30.3 6.28,73.66 ; J30.3 3.88,73.66 ; J30.3 5.08,72.46 ; J30.3 5.08,74.86
  LAYER_2 w0.127: J31.1 86.36,44.38 ; J31.1 85.16,43.18 ; J31.1 86.36,41.98 ; J31.1 87.56,43.18 ; J29.4 73.66,62.16 ; J29.4 74.86,60.96 ; J29.4 72.46,60.96 ; J29.4 73.66,59.76 ; 34.36,66.04 J28.1 ; J28.1 36.76,66.04 ; J28.1 35.56,67.24 ; J28.1 35.56,64.84 ; J36.2 42.93,79.94 ; J36.2 41.73,78.74 ; J36.2 44.12,78.74 ; J36.2 42.93,77.54 ; J36.4 48.01,74.86 ; J36.4 46.81,73.66 ; J36.4 49.2,73.66 ; J36.4 48.01,72.46 ; J25.2 68.58,44.38 ; J25.2 68.58,41.98 ; J25.2 69.78,43.18 ; J25.2 67.38,43.18 ; 69.72,0.34 J2.9 ; J2.9 69.72,2.2 ; J2.9 70.66,1.27 ; J2.9 68.79,1.27 ; 68.58,29.28 J23.2 ; J23.2 67.38,30.48 ; J23.2 69.78,30.48 ; J23.2 68.58,31.68 ; 35.56,24.2 J7.4 ; J7.4 36.76,25.4 ; J7.4 34.36,25.4 ; J7.4 35.56,26.6 ; 17.78,41.98 J11.2 ; J11.2 18.98,43.18 ; J11.2 17.78,44.38 ; J11.2 16.58,43.18 ; J16.3 68.58,74.86 ; J16.3 67.38,73.66 ; J16.3 69.78,73.66 ; J16.3 68.58,72.46 ; 80.08,30.48 J19.2 ; J19.2 81.28,31.68 ; J19.2 82.48,30.48 ; J19.2 81.28,29.28 ; 21.66,43.18 J11.1 ; J11.1 24.06,43.18 ; J11.1 22.86,41.98 ; J11.1 22.86,44.38 ; 47.06,38.1 J34.4 ; J34.4 48.26,36.9 ; J34.4 49.46,38.1 ; J34.4 48.26,39.3 ; 99.06,36.9 J20.4 ; J20.4 99.06,39.3 ; J20.4 100.26,38.1 ; J20.4 97.86,38.1 ; J1.9 24.94,1.27 ; J1.9 23.07,1.27 ; J1.9 24,2.2 ; J1.9 24,0.34 ; 93.98,41.98 J20.2 ; J20.2 92.78,43.18 ; J20.2 93.98,44.38 ; J20.2 95.18,43.18 ; J16.4 73.66,74.86 ; J16.4 74.86,73.66 ; J16.4 72.46,73.66 ; J16.4 73.66,72.46 ; 35.56,29.28 J7.1 ; J7.1 35.56,31.68 ; J7.1 34.36,30.48 ; J7.1 36.76,30.48 ; J27.3 95.18,25.4 ; J27.3 93.98,26.6 ; J27.3 92.78,25.4 ; J27.3 93.98,24.2 ; J15.4 48.26,26.6 ; J15.4 47.06,25.4 ; J15.4 48.26,24.2 ; J15.4 49.46,25.4 ; J6.1 11.36,30.48 ; J6.1 8.96,30.48 ; J6.1 10.16,31.68 ; J6.1 10.16,29.28 ; 21.66,30.48 J14.1 ; J14.1 24.06,30.48 ; J14.1 22.86,31.68 ; J14.1 22.86,29.28 ; 55.88,41.98 J17.2 ; J17.2 54.68,43.18 ; J17.2 55.88,44.38 ; J17.2 57.08,43.18 ; 85.16,66.04 J24.1 ; J24.1 86.36,64.84 ; J24.1 86.36,67.24 ; J24.1 87.56,66.04 ; J28.2 30.48,67.24 ; J28.2 30.48,64.84 ; J28.2 31.68,66.04 ; J28.2 29.28,66.04 ; 55.88,77.54 J13.2 ; J13.2 54.68,78.74 ; J13.2 55.88,79.94 ; J13.2 57.08,78.74 ; J23.1 74.86,30.48 ; J23.1 73.66,31.68 ; J23.1 72.46,30.48 ; J23.1 73.66,29.28 ; 22.86,64.84 J35.1 ; J35.1 24.06,66.04 ; J35.1 22.86,67.24 ; J35.1 21.66,66.04 ; 30.48,72.46 J10.3 ; J10.3 30.48,74.86 ; J10.3 29.28,73.66 ; J10.3 31.68,73.66 ; 93.98,64.84 J22.2 ; J22.2 93.98,67.24 ; J22.2 95.18,66.04 ; J22.2 92.78,66.04 ; J32.1 35.56,44.38 ; J32.1 35.56,41.98 ; J32.1 34.36,43.18 ; J32.1 36.76,43.18 ; J29.2 69.78,66.04 ; J29.2 68.58,67.24 ; J29.2 67.38,66.04 ; J29.2 68.58,64.84 ; 60.96,36.9 J17.4 ; J17.4 62.16,38.1 ; J17.4 59.76,38.1 ; J17.4 60.96,39.3 ; J6.4 11.36,25.4 ; J6.4 8.96,25.4 ; J6.4 10.16,26.6 ; J6.4 10.16,24.2 ; J27.1 100.26,30.48 ; J27.1 99.06,29.28 ; J27.1 97.86,30.48 ; J27.1 99.06,31.68 ; 68.58,77.54 J16.2 ; J16.2 68.58,79.94 ; J16.2 67.38,78.74 ; J16.2 69.78,78.74 ; 59.76,73.66 J13.4 ; J13.4 60.96,74.86 ; J13.4 60.96,72.46 ; J13.4 62.16,73.66 ; J7.3 30.48,26.6 ; J7.3 30.48,24.2 ; J7.3 29.28,25.4 ; J7.3 31.68,25.4 ; 85.16,78.74 J5.1 ; J5.1 86.36,79.94 ; J5.1 87.56,78.74 ; J5.1 86.36,77.54 ; 93.98,59.76 J22.3 ; J22.3 92.78,60.96 ; J22.3 93.98,62.16 ; J22.3 95.18,60.96 ; 97.86,78.74 J8.1 ; J8.1 100.26,78.74 ; J8.1 99.06,77.54 ; J8.1 99.06,79.94 ; J34.3 43.18,39.3 ; J34.3 44.38,38.1 ; J34.3 41.98,38.1 ; J34.3 43.18,36.9 ; 41.98,66.04 J26.2 ; J26.2 43.18,67.24 ; J26.2 44.38,66.04 ; J26.2 43.18,64.84 ; 17.78,24.2 J14.3 ; J14.3 16.58,25.4 ; J14.3 17.78,26.6 ; J14.3 18.98,25.4 ; 97.86,25.4 J27.4 ; J27.4 100.26,25.4 ; J27.4 99.06,24.2 ; J27.4 99.06,26.6 ; J6.3 5.08,26.6 ; J6.3 6.28,25.4 ; J6.3 3.88,25.4 ; J6.3 5.08,24.2 ; J35.4 22.86,62.16 ; J35.4 24.06,60.96 ; J35.4 22.86,59.76 ; J35.4 21.66,60.96 ; 59.76,43.18 J17.1 ; J17.1 60.96,44.38 ; J17.1 60.96,41.98 ; J17.1 62.16,43.18 ; 3.88,73.66 J30.3 ; J30.3 5.08,72.46 ; J30.3 5.08,74.86 ; J30.3 6.28,73.66 ; 16.58,66.04 J35.2 ; J35.2 18.98,66.04 ; J35.2 17.78,67.24 ; J35.2 17.78,64.84 ; J25.3 69.78,38.1 ; J25.3 68.58,36.9 ; J25.3 67.38,38.1 ; J25.3 68.58,39.3 ; J24.4 87.56,60.96 ; J24.4 86.36,62.16 ; J24.4 85.16,60.96 ; J24.4 86.36,59.76 ; J34.1 49.46,43.18 ; J34.1 48.26,41.98 ; J34.1 47.06,43.18 ; J34.1 48.26,44.38 ; 34.36,78.74 J10.1 ; J10.1 36.76,78.74 ; J10.1 35.56,77.54 ; J10.1 35.56,79.94 ; J8.2 95.18,78.74 ; J8.2 93.98,77.54 ; J8.2 92.78,78.74 ; J8.2 93.98,79.94 ; J15.1 48.26,31.68 ; J15.1 48.26,29.28 ; J15.1 47.06,30.48 ; J15.1 49.46,30.48 ; 45.93,3.81 J3.10 ; J3.10 46.86,4.74 ; J3.10 46.86,2.88 ; J3.10 47.8,3.81 ; 72.46,66.04 J29.1 ; J29.1 73.66,64.84 ; J29.1 73.66,67.24 ; J29.1 74.86,66.04 ; 41.98,43.18 J34.2 ; J34.2 44.38,43.18 ; J34.2 43.18,41.98 ; J34.2 43.18,44.38 ; J18.4 22.86,74.86 ; J18.4 24.06,73.66 ; J18.4 21.66,73.66 ; J18.4 22.86,72.46 ; 30.48,36.9 J32.3 ; J32.3 30.48,39.3 ; J32.3 31.68,38.1 ; J32.3 29.28,38.1 ; 22.86,36.9 J11.4 ; J11.4 21.66,38.1 ; J11.4 22.86,39.3 ; J11.4 24.06,38.1 ; J12.4 10.16,62.16 ; J12.4 8.96,60.96 ; J12.4 10.16,59.76 ; J12.4 11.36,60.96 ; J19.4 86.36,26.6 ; J19.4 87.56,25.4 ; J19.4 85.16,25.4 ; J19.4 86.36,24.2 ; 99.06,64.84 J22.1 ; J22.1 100.26,66.04 ; J22.1 99.06,67.24 ; J22.1 97.86,66.04 ; J30.2 6.28,78.74 ; J30.2 5.08,79.94 ; J30.2 5.08,77.54 ; J30.2 3.88,78.74 ; 60.96,29.28 J21.1 ; J21.1 62.16,30.48 ; J21.1 60.96,31.68 ; J21.1 59.76,30.48 ; J2.10 69.72,4.74 ; J2.10 69.72,2.88 ; J2.10 70.66,3.81 ; J2.10 68.79,3.81 ; 80.08,60.96 J24.3 ; J24.3 81.28,62.16 ; J24.3 82.48,60.96 ; J24.3 81.28,59.76 ; J14.4 24.06,25.4 ; J14.4 22.86,24.2 ; J14.4 22.86,26.6 ; J14.4 21.66,25.4 ; J15.2 44.38,30.48 ; J15.2 43.18,29.28 ; J15.2 43.18,31.68 ; J15.2 41.98,30.48 ; J24.2 82.48,66.04 ; J24.2 81.28,67.24 ; J24.2 80.08,66.04 ; J24.2 81.28,64.84 ; 8.96,38.1 J9.4 ; J9.4 11.36,38.1 ; J9.4 10.16,39.3 ; J9.4 10.16,36.9 ; J31.4 87.56,38.1 ; J31.4 85.16,38.1 ; J31.4 86.36,36.9 ; J31.4 86.36,39.3 ; J4.9 92.58,2.2 ; J4.9 91.65,1.27 ; J4.9 93.52,1.27 ; J4.9 92.58,0.34 ; 35.56,72.46 J10.4 ; J10.4 36.76,73.66 ; J10.4 34.36,73.66 ; J10.4 35.56,74.86 ; J31.3 81.28,39.3 ; J31.3 80.08,38.1 ; J31.3 82.48,38.1 ; J31.3 81.28,36.9 ; J9.1 10.16,44.38 ; J9.1 11.36,43.18 ; J9.1 10.16,41.98 ; J9.1 8.96,43.18 ; J23.3 68.58,26.6 ; J23.3 67.38,25.4 ; J23.3 68.58,24.2 ; J23.3 69.78,25.4 ; 5.08,29.28 J6.2 ; J6.2 5.08,31.68 ; J6.2 6.28,30.48 ; J6.2 3.88,30.48 ; 92.78,30.48 J27.2 ; J27.2 93.98,29.28 ; J27.2 95.18,30.48 ; J27.2 93.98,31.68 ; J11.3 17.78,39.3 ; J11.3 17.78,36.9 ; J11.3 18.98,38.1 ; J11.3 16.58,38.1 ; 54.68,38.1 J17.3 ; J17.3 57.08,38.1 ; J17.3 55.88,36.9 ; J17.3 55.88,39.3 ; 22.86,77.54 J18.1 ; J18.1 24.06,78.74 ; J18.1 22.86,79.94 ; J18.1 21.66,78.74 ; J26.3 44.38,60.96 ; J26.3 41.98,60.96 ; J26.3 43.18,62.16 ; J26.3 43.18,59.76 ; J28.3 30.48,62.16 ; J28.3 29.28,60.96 ; J28.3 30.48,59.76 ; J28.3 31.68,60.96 ; J36.3 44.12,73.66 ; J36.3 42.93,72.46 ; J36.3 42.93,74.86 ; J36.3 41.73,73.66 ; 93.98,36.9 J20.3 ; J20.3 95.18,38.1 ; J20.3 93.98,39.3 ; J20.3 92.78,38.1 ; J21.2 57.08,30.48 ; J21.2 55.88,31.68 ; J21.2 55.88,29.28 ; J21.2 54.68,30.48 ; 10.16,64.84 J12.1 ; J12.1 8.96,66.04 ; J12.1 10.16,67.24 ; J12.1 11.36,66.04 ; J18.2 17.78,79.94 ; J18.2 18.98,78.74 ; J18.2 16.58,78.74 ; J18.2 17.78,77.54 ; 80.08,73.66 J5.3 ; J5.3 81.28,72.46 ; J5.3 81.28,74.86 ; J5.3 82.48,73.66 ; 5.08,59.76 J12.3 ; J12.3 6.28,60.96 ; J12.3 5.08,62.16 ; J12.3 3.88,60.96 ; 55.88,59.76 J33.3 ; J33.3 57.08,60.96 ; J33.3 54.68,60.96 ; J33.3 55.88,62.16 ; 60.96,24.2 J21.4 ; J21.4 59.76,25.4 ; J21.4 62.16,25.4 ; J21.4 60.96,26.6 ; J25.1 74.86,43.18 ; J25.1 73.66,41.98 ; J25.1 73.66,44.38 ; J25.1 72.46,43.18 ; J15.3 43.18,26.6 ; J15.3 44.38,25.4 ; J15.3 41.98,25.4 ; J15.3 43.18,24.2 ; J26.4 48.26,62.16 ; J26.4 49.46,60.96 ; J26.4 48.26,59.76 ; J26.4 47.06,60.96 ; 3.88,43.18 J9.2 ; J9.2 6.28,43.18 ; J9.2 5.08,41.98 ; J9.2 5.08,44.38 ; J33.4 60.96,62.16 ; J33.4 59.76,60.96 ; J33.4 62.16,60.96 ; J33.4 60.96,59.76 ; J35.3 17.78,62.16 ; J35.3 17.78,59.76 ; J35.3 16.58,60.96 ; J35.3 18.98,60.96 ; J13.3 55.88,74.86 ; J13.3 54.68,73.66 ; J13.3 55.88,72.46 ; J13.3 57.08,73.66 ; J19.1 87.56,30.48 ; J19.1 85.16,30.48 ; J19.1 86.36,31.68 ; J19.1 86.36,29.28 ; 3.88,66.04 J12.2 ; J12.2 5.08,67.24 ; J12.2 5.08,64.84 ; J12.2 6.28,66.04 ; 59.76,66.04 J33.1 ; J33.1 60.96,67.24 ; J33.1 62.16,66.04 ; J33.1 60.96,64.84 ; J4.10 93.52,3.81 ; J4.10 91.65,3.81 ; J4.10 92.58,2.88 ; J4.10 92.58,4.74 ; J7.2 30.48,31.68 ; J7.2 29.28,30.48 ; J7.2 30.48,29.28 ; J7.2 31.68,30.48 ; J1.10 24.94,3.81 ; J1.10 24,2.88 ; J1.10 23.07,3.81 ; J1.10 24,4.74 ; J10.2 30.48,79.94 ; J10.2 31.68,78.74 ; J10.2 30.48,77.54 ; J10.2 29.28,78.74 ; 48.01,77.54 J36.1 ; J36.1 49.2,78.74 ; J36.1 48.01,79.94 ; J36.1 46.81,78.74 ; 16.58,73.66 J18.3 ; J18.3 17.78,72.46 ; J18.3 17.78,74.86 ; J18.3 18.98,73.66 ; 47.06,66.04 J26.1 ; J26.1 49.46,66.04 ; J26.1 48.26,64.84 ; J26.1 48.26,67.24 ; 55.88,24.2 J21.3 ; J21.3 55.88,26.6 ; J21.3 57.08,25.4 ; J21.3 54.68,25.4 ; J32.4 35.56,39.3 ; J32.4 34.36,38.1 ; J32.4 36.76,38.1 ; J32.4 35.56,36.9 ; J30.4 10.16,74.86 ; J30.4 10.16,72.46 ; J30.4 11.36,73.66 ; J30.4 8.96,73.66 ; J20.1 100.26,43.18 ; J20.1 99.06,41.98 ; J20.1 97.86,43.18 ; J20.1 99.06,44.38 ; 5.08,36.9 J9.3 ; J9.3 3.88,38.1 ; J9.3 5.08,39.3 ; J9.3 6.28,38.1 ; J3.9 46.86,2.2 ; J3.9 45.93,1.27 ; J3.9 47.8,1.27 ; J3.9 46.86,0.34 ; J32.2 31.68,43.18 ; J32.2 29.28,43.18 ; J32.2 30.48,41.98 ; J32.2 30.48,44.38 ; 34.36,60.96 J28.4 ; J28.4 35.56,59.76 ; J28.4 36.76,60.96 ; J28.4 35.56,62.16 ; 68.58,59.76 J29.3 ; J29.3 67.38,60.96 ; J29.3 68.58,62.16 ; J29.3 69.78,60.96 ; J30.1 11.36,78.74 ; J30.1 10.16,77.54 ; J30.1 8.96,78.74 ; J30.1 10.16,79.94 ; J8.3 95.18,73.66 ; J8.3 93.98,74.86 ; J8.3 92.78,73.66 ; J8.3 93.98,72.46 ; 54.68,66.04 J33.2 ; J33.2 55.88,67.24 ; J33.2 55.88,64.84 ; J33.2 57.08,66.04 ; J31.2 81.28,44.38 ; J31.2 81.28,41.98 ; J31.2 82.48,43.18 ; J31.2 80.08,43.18 ; 72.46,78.74 J16.1 ; J16.1 73.66,77.54 ; J16.1 74.86,78.74 ; J16.1 73.66,79.94 ; 59.76,78.74 J13.1 ; J13.1 60.96,79.94 ; J13.1 60.96,77.54 ; J13.1 62.16,78.74 ; J19.3 81.28,26.6 ; J19.3 81.28,24.2 ; J19.3 82.48,25.4 ; J19.3 80.08,25.4 ; J8.4 99.06,74.86 ; J8.4 100.26,73.66 ; J8.4 97.86,73.66 ; J8.4 99.06,72.46 ; 80.08,78.74 J5.2 ; J5.2 82.48,78.74 ; J5.2 81.28,79.94 ; J5.2 81.28,77.54 ; 86.36,72.46 J5.4 ; J5.4 87.56,73.66 ; J5.4 85.16,73.66 ; J5.4 86.36,74.86 ; J25.4 74.86,38.1 ; J25.4 72.46,38.1 ; J25.4 73.66,36.9 ; J25.4 73.66,39.3 ; J22.4 100.26,60.96 ; J22.4 99.06,62.16 ; J22.4 99.06,59.76 ; J22.4 97.86,60.96 ; J23.4 73.66,26.6 ; J23.4 72.46,25.4 ; J23.4 74.86,25.4 ; J23.4 73.66,24.2 ; 17.78,29.28 J14.2 ; J14.2 16.58,30.48 ; J14.2 17.78,31.68 ; J14.2 18.98,30.48
  BOTTOM w0.127: 86.36,36.9 J31.4 ; J31.4 87.56,38.1 ; J31.4 85.16,38.1 ; J31.4 86.36,39.3 ; J24.4 87.56,60.96 ; J24.4 85.16,60.96 ; J24.4 86.36,62.16 ; J24.4 86.36,59.76 ; J10.4 36.76,73.66 ; J10.4 35.56,74.86 ; J10.4 35.56,72.46 ; J10.4 34.36,73.66 ; 10.16,24.2 J6.4 ; J6.4 8.96,25.4 ; J6.4 11.36,25.4 ; J6.4 10.16,26.6 ; J16.2 68.58,79.94 ; J16.2 69.78,78.74 ; J16.2 67.38,78.74 ; J16.2 68.58,77.54 ; 34.36,60.96 J28.4 ; J28.4 35.56,62.16 ; J28.4 36.76,60.96 ; J28.4 35.56,59.76 ; 68.79,3.81 J2.10 ; J2.10 69.72,4.74 ; J2.10 70.66,3.81 ; J2.10 69.72,2.88 ; J15.4 48.26,26.6 ; J15.4 49.46,25.4 ; J15.4 48.26,24.2 ; J15.4 47.06,25.4 ; 17.78,41.98 J11.2 ; J11.2 16.58,43.18 ; J11.2 18.98,43.18 ; J11.2 17.78,44.38 ; J13.4 62.16,73.66 ; J13.4 59.76,73.66 ; J13.4 60.96,74.86 ; J13.4 60.96,72.46 ; J24.1 86.36,67.24 ; J24.1 87.56,66.04 ; J24.1 85.16,66.04 ; J24.1 86.36,64.84 ; 73.66,77.54 J16.1 74.86,78.74 ; J23.3 69.78,25.4 ; J23.3 68.58,26.6 ; J23.3 67.38,25.4 ; J23.3 68.58,24.2 ; J14.3 17.78,26.6 ; J14.3 18.98,25.4 ; J14.3 17.78,24.2 ; J14.3 16.58,25.4 ; J31.3 82.48,38.1 ; J31.3 80.08,38.1 ; J31.3 81.28,36.9 ; J31.3 81.28,39.3 ; 47.06,30.48 J15.1 ; J15.1 49.46,30.48 ; J15.1 48.26,29.28 ; J20.2 93.98,44.38 ; J20.2 95.18,43.18 ; J20.2 92.78,43.18 ; J20.2 93.98,41.98 ; J21.1 60.96,31.68 ; J21.1 62.16,30.48 ; J21.1 59.76,30.48 ; J21.1 60.96,29.28 ; J20.4 99.06,39.3 ; J20.4 99.06,36.9 ; J20.4 97.86,38.1 ; J20.4 100.26,38.1 ; 59.76,60.96 J33.4 ; J33.4 60.96,62.16 ; J33.4 60.96,59.76 ; J33.4 62.16,60.96 ; J26.3 43.18,62.16 ; J26.3 44.38,60.96 ; J26.3 41.98,60.96 ; J26.3 43.18,59.76 ; 22.86,77.54 J18.1 ; J18.1 21.66,78.74 ; J18.1 22.86,79.94 ; J18.1 24.06,78.74 ; 81.28,72.46 J5.3 ; J5.3 80.08,73.66 ; J5.3 82.48,73.66 ; J5.3 81.28,74.86 ; J32.4 36.76,38.1 ; J32.4 35.56,39.3 ; J32.4 34.36,38.1 ; 85.16,78.74 J5.1 ; J5.1 86.36,77.54 ; J5.1 86.36,79.94 ; J5.1 87.56,78.74 ; J33.1 62.16,66.04 ; J33.1 60.96,64.84 ; J33.1 59.76,66.04 ; J33.1 60.96,67.24 ; J14.1 24.06,30.48 ; J14.1 22.86,31.68 ; J14.1 21.66,30.48 ; J14.1 22.86,29.28 ; 43.18,64.84 J26.2 ; J26.2 41.98,66.04 ; J26.2 44.38,66.04 ; J26.2 43.18,67.24 ; 41.98,38.1 J34.3 ; J34.3 43.18,36.9 ; J34.3 43.18,39.3 ; J34.3 44.38,38.1 ; J14.2 18.98,30.48 ; J14.2 16.58,30.48 ; J14.2 17.78,29.28 ; J14.2 17.78,31.68 ; J4.10 92.58,4.74 ; J4.10 92.58,2.88 ; J4.10 93.52,3.81 ; J4.10 91.65,3.81 ; J32.3 30.48,39.3 ; J32.3 31.68,38.1 ; J32.3 30.48,36.9 ; J32.3 29.28,38.1 ; J6.3 6.28,25.4 ; J6.3 5.08,26.6 ; J6.3 5.08,24.2 ; J6.3 3.88,25.4 ; J23.1 73.66,31.68 ; J23.1 72.46,30.48 ; J23.1 74.86,30.48 ; J23.1 73.66,29.28 ; 92.78,78.74 J8.2 ; J8.2 95.18,78.74 ; J8.2 93.98,79.94 ; J8.2 93.98,77.54 ; J30.3 6.28,73.66 ; J30.3 5.08,74.86 ; J30.3 5.08,72.46 ; J30.3 3.88,73.66 ; 97.86,25.4 J27.4 ; J27.4 100.26,25.4 ; J27.4 99.06,24.2 ; J27.4 99.06,26.6 ; 67.38,30.48 J23.2 ; J23.2 68.58,31.68 ; J23.2 69.78,30.48 ; J23.2 68.58,29.28 ; J6.2 6.28,30.48 ; J6.2 5.08,31.68 ; J6.2 3.88,30.48 ; J6.2 5.08,29.28 ; 86.36,29.28 J19.1 ; J19.1 85.16,30.48 ; J19.1 86.36,31.68 ; J19.1 87.56,30.48 ; J21.3 55.88,26.6 ; J21.3 54.68,25.4 ; J21.3 57.08,25.4 ; 21.66,38.1 J11.4 ; J11.4 24.06,38.1 ; J11.4 22.86,36.9 ; J11.4 22.86,39.3 ; J24.2 82.48,66.04 ; J24.2 81.28,64.84 ; J24.2 80.08,66.04 ; J24.2 81.28,67.24 ; J8.1 100.26,78.74 ; J8.1 99.06,77.54 ; J8.1 97.86,78.74 ; J8.1 99.06,79.94 ; 22.86,59.76 J35.4 ; J35.4 22.86,62.16 ; J35.4 21.66,60.96 ; J35.4 24.06,60.96 ; 81.28,41.98 J31.2 ; J31.2 81.28,44.38 ; J31.2 82.48,43.18 ; J31.2 80.08,43.18 ; J12.4 10.16,62.16 ; J12.4 8.96,60.96 ; J12.4 11.36,60.96 ; J12.4 10.16,59.76 ; 16.58,78.74 J18.2 ; J18.2 17.78,77.54 ; J18.2 17.78,79.94 ; J18.2 18.98,78.74 ; 97.86,30.48 J27.1 ; J27.1 99.06,31.68 ; J27.1 99.06,29.28 ; J27.1 100.26,30.48 ; 22.86,41.98 J11.1 ; J11.1 24.06,43.18 ; J11.1 22.86,44.38 ; J11.1 21.66,43.18 ; 24,0.34 J1.9 ; J1.9 24.94,1.27 ; J1.9 24,2.2 ; J1.9 23.07,1.27 ; 67.38,66.04 J29.2 ; J29.2 68.58,67.24 ; J29.2 69.78,66.04 ; J29.2 68.58,64.84 ; 10.16,77.54 J30.1 11.36,78.74 ; 41.73,78.74 J36.2 ; J36.2 42.93,79.94 ; J36.2 42.93,77.54 ; J36.2 44.12,78.74 ; 92.58,0.34 J4.9 ; J4.9 91.65,1.27 ; J4.9 92.58,2.2 ; J4.9 93.52,1.27 ; J26.1 48.26,67.24 ; J26.1 47.06,66.04 ; J26.1 49.46,66.04 ; J26.1 48.26,64.84 ; J31.1 86.36,44.38 ; J31.1 85.16,43.18 ; J31.1 86.36,41.98 ; J31.1 87.56,43.18 ; 73.66,59.76 J29.4 ; J29.4 72.46,60.96 ; J29.4 74.86,60.96 ; J29.4 73.66,62.16 ; J12.2 6.28,66.04 ; J12.2 5.08,64.84 ; J12.2 5.08,67.24 ; J12.2 3.88,66.04 ; J13.3 57.08,73.66 ; J13.3 54.68,73.66 ; J13.3 55.88,72.46 ; J13.3 55.88,74.86 ; J21.2 55.88,31.68 ; J21.2 55.88,29.28 ; J21.2 57.08,30.48 ; J21.2 54.68,30.48 ; J22.4 99.06,62.16 ; J22.4 100.26,60.96 ; J22.4 99.06,59.76 ; J22.4 97.86,60.96 ; 93.98,24.2 J27.3 ; J27.3 92.78,25.4 ; J27.3 93.98,26.6 ; J27.3 95.18,25.4 ; 17.78,72.46 J18.3 ; J18.3 16.58,73.66 ; J18.3 18.98,73.66 ; J18.3 17.78,74.86 ; J36.4 49.2,73.66 ; J36.4 48.01,74.86 ; J36.4 48.01,72.46 ; J36.4 46.81,73.66 ; 29.28,60.96 J28.3 ; J28.3 30.48,62.16 ; J28.3 31.68,60.96 ; J28.3 30.48,59.76 ; J28.2 30.48,67.24 ; J28.2 29.28,66.04 ; J28.2 30.48,64.84 ; J28.2 31.68,66.04 ; 16.58,60.96 J35.3 ; J35.3 18.98,60.96 ; J35.3 17.78,62.16 ; J35.3 17.78,59.76 ; J2.9 69.72,2.2 ; J2.9 68.79,1.27 ; J2.9 70.66,1.27 ; J2.9 69.72,0.34 ; J30.4 11.36,73.66 ; J30.4 10.16,72.46 ; J30.4 10.16,74.86 ; J30.4 8.96,73.66 ; J19.4 87.56,25.4 ; J19.4 86.36,24.2 ; J19.4 86.36,26.6 ; J19.4 85.16,25.4 ; J33.3 55.88,62.16 ; J33.3 57.08,60.96 ; J33.3 55.88,59.76 ; J33.3 54.68,60.96 ; 55.88,64.84 J33.2 ; J33.2 55.88,67.24 ; J33.2 54.68,66.04 ; J33.2 57.08,66.04 ; J16.3 69.78,73.66 ; J16.3 68.58,72.46 ; J16.3 68.58,74.86 ; J16.3 67.38,73.66 ; 35.56,77.54 J10.1 ; J10.1 34.36,78.74 ; J10.1 35.56,79.94 ; J10.1 36.76,78.74 ; J18.4 24.06,73.66 ; J18.4 22.86,72.46 ; J18.4 21.66,73.66 ; J18.4 22.86,74.86 ; J16.4 74.86,73.66 ; J16.4 73.66,72.46 ; J16.4 73.66,74.86 ; J16.4 72.46,73.66 ; J9.4 11.36,38.1 ; J9.4 10.16,39.3 ; J9.4 8.96,38.1 ; 5.08,41.98 J9.2 ; J9.2 5.08,44.38 ; J9.2 6.28,43.18 ; J9.2 3.88,43.18 ; J12.3 6.28,60.96 ; J12.3 5.08,62.16 ; J12.3 3.88,60.96 ; J12.3 5.08,59.76 ; 92.78,38.1 J20.3 ; J20.3 93.98,39.3 ; J20.3 95.18,38.1 ; J20.3 93.98,36.9 ; J34.4 49.46,38.1 ; J34.4 48.26,39.3 ; J34.4 47.06,38.1 ; J34.4 48.26,36.9 ; J17.1 62.16,43.18 ; J17.1 60.96,44.38 ; J17.1 60.96,41.98 ; J17.1 59.76,43.18 ; 41.98,25.4 J15.3 ; J15.3 43.18,24.2 ; J15.3 43.18,26.6 ; J15.3 44.38,25.4 ; 34.36,30.48 J7.1 ; J7.1 35.56,31.68 ; J7.1 36.76,30.48 ; J7.1 35.56,29.28 ; 35.56,64.84 J28.1 ; J28.1 34.36,66.04 ; J28.1 36.76,66.04 ; J28.1 35.56,67.24 ; J10.2 30.48,79.94 ; J10.2 31.68,78.74 ; J10.2 30.48,77.54 ; J10.2 29.28,78.74 ; 73.66,64.84 J29.1 ; J29.1 74.86,66.04 ; J29.1 73.66,67.24 ; J29.1 72.46,66.04 ; 43.18,41.98 J34.2 ; J34.2 41.98,43.18 ; J34.2 43.18,44.38 ; J34.2 44.38,43.18 ; 3.88,38.1 J9.3 ; J9.3 6.28,38.1 ; J9.3 5.08,39.3 ; J3.10 47.8,3.81 ; J3.10 46.86,2.88 ; J3.10 45.93,3.81 ; J7.3 30.48,26.6 ; J7.3 31.68,25.4 ; J7.3 29.28,25.4 ; J35.2 18.98,66.04 ; J35.2 17.78,64.84 ; J35.2 16.58,66.04 ; J35.2 17.78,67.24 ; J14.4 22.86,26.6 ; J14.4 22.86,24.2 ; J14.4 21.66,25.4 ; J14.4 24.06,25.4 ; J22.2 93.98,67.24 ; J22.2 95.18,66.04 ; J22.2 93.98,64.84 ; J22.2 92.78,66.04 ; J23.4 73.66,26.6 ; J23.4 74.86,25.4 ; J23.4 73.66,24.2 ; J23.4 72.46,25.4 ; 92.78,60.96 J22.3 ; J22.3 93.98,62.16 ; J22.3 95.18,60.96 ; J22.3 93.98,59.76 ; J34.1 49.46,43.18 ; J34.1 48.26,44.38 ; J34.1 47.06,43.18 ; J34.1 48.26,41.98 ; J17.4 62.16,38.1 ; J17.4 60.96,36.9 ; J17.4 59.76,38.1 ; J17.4 60.96,39.3 ; J7.2 31.68,30.48 ; J7.2 29.28,30.48 ; J7.2 30.48,29.28 ; J7.2 30.48,31.68 ; 97.86,73.66 J8.4 ; J8.4 100.26,73.66 ; J8.4 99.06,74.86 ; J8.4 99.06,72.46 ; J36.3 42.93,74.86 ; J36.3 41.73,73.66 ; J36.3 42.93,72.46 ; J36.3 44.12,73.66 ; 81.28,29.28 J19.2 ; J19.2 82.48,30.48 ; J19.2 81.28,31.68 ; J19.2 80.08,30.48 ; 55.88,77.54 J13.2 ; J13.2 54.68,78.74 ; J13.2 55.88,79.94 ; J13.2 57.08,78.74 ; 46.86,0.34 J3.9 ; J3.9 46.86,2.2 ; J3.9 47.8,1.27 ; J3.9 45.93,1.27 ; J30.2 6.28,78.74 ; J30.2 5.08,77.54 ; J30.2 5.08,79.94 ; J30.2 3.88,78.74 ; J24.3 82.48,60.96 ; J24.3 80.08,60.96 ; J24.3 81.28,62.16 ; J24.3 81.28,59.76 ; 99.06,41.98 J20.1 ; J20.1 99.06,44.38 ; J20.1 100.26,43.18 ; J20.1 97.86,43.18 ; 99.06,64.84 J22.1 ; J22.1 100.26,66.04 ; J22.1 97.86,66.04 ; J22.1 99.06,67.24 ; 24,2.88 J1.10 24.94,3.81 ; J25.4 74.86,38.1 ; J25.4 72.46,38.1 ; J25.4 73.66,36.9 ; J25.4 73.66,39.3 ; J13.1 62.16,78.74 ; J13.1 60.96,79.94 ; J13.1 59.76,78.74 ; J13.1 60.96,77.54 ; 68.58,36.9 J25.3 ; J25.3 67.38,38.1 ; J25.3 68.58,39.3 ; J25.3 69.78,38.1 ; J15.2 44.38,30.48 ; J15.2 43.18,29.28 ; J15.2 43.18,31.68 ; J15.2 41.98,30.48 ; J6.1 11.36,30.48 ; J6.1 8.96,30.48 ; J6.1 10.16,29.28 ; 35.56,41.98 J32.1 ; J32.1 36.76,43.18 ; J32.1 34.36,43.18 ; J32.1 35.56,44.38 ; 86.36,72.46 J5.4 ; J5.4 86.36,74.86 ; J5.4 85.16,73.66 ; J5.4 87.56,73.66 ; 46.81,78.74 J36.1 ; J36.1 48.01,79.94 ; J36.1 49.2,78.74 ; J36.1 48.01,77.54 ; J12.1 10.16,67.24 ; J12.1 10.16,64.84 ; J12.1 8.96,66.04 ; J12.1 11.36,66.04 ; J11.3 18.98,38.1 ; J11.3 16.58,38.1 ; J11.3 17.78,36.9 ; J11.3 17.78,39.3 ; J35.1 24.06,66.04 ; J35.1 22.86,64.84 ; J35.1 21.66,66.04 ; J35.1 22.86,67.24 ; 67.38,60.96 J29.3 ; J29.3 68.58,62.16 ; J29.3 69.78,60.96 ; J29.3 68.58,59.76 ; 81.28,77.54 J5.2 ; J5.2 81.28,79.94 ; J5.2 82.48,78.74 ; J5.2 80.08,78.74 ; J17.3 57.08,38.1 ; J17.3 55.88,36.9 ; J17.3 55.88,39.3 ; J17.3 54.68,38.1 ; J21.4 62.16,25.4 ; J21.4 60.96,26.6 ; J21.4 59.76,25.4 ; 30.48,72.46 J10.3 ; J10.3 31.68,73.66 ; J10.3 30.48,74.86 ; J10.3 29.28,73.66 ; J25.2 68.58,44.38 ; J25.2 69.78,43.18 ; J25.2 68.58,41.98 ; J25.2 67.38,43.18 ; 72.46,43.18 J25.1 ; J25.1 74.86,43.18 ; J25.1 73.66,41.98 ; J25.1 73.66,44.38 ; 34.36,25.4 J7.4 ; J7.4 35.56,26.6 ; J7.4 36.76,25.4 ; 10.16,41.98 J9.1 ; J9.1 11.36,43.18 ; J9.1 10.16,44.38 ; J9.1 8.96,43.18 ; 81.28,24.2 J19.3 ; J19.3 82.48,25.4 ; J19.3 80.08,25.4 ; J19.3 81.28,26.6 ; 93.98,72.46 J8.3 ; J8.3 92.78,73.66 ; J8.3 95.18,73.66 ; J8.3 93.98,74.86 ; 47.06,60.96 J26.4 ; J26.4 48.26,62.16 ; J26.4 49.46,60.96 ; J26.4 48.26,59.76 ; 93.98,29.28 J27.2 ; J27.2 92.78,30.48 ; J27.2 93.98,31.68 ; J27.2 95.18,30.48 ; 30.48,41.98 J32.2 ; J32.2 29.28,43.18 ; J32.2 31.68,43.18 ; J32.2 30.48,44.38 ; 54.68,43.18 J17.2 ; J17.2 55.88,44.38 ; J17.2 57.08,43.18 ; J17.2 55.88,41.98
  vias: v1(1.58,36.36) v1(1.58,35.09) v1(1.58,33.82) v1(1.58,32.55) v1(1.58,31.28) v1(1.58,30.01) v1(1.58,28.74) v1(1.58,27.47) v1(1.58,26.2) v1(1.58,24.93) v1(1.58,23.66) v1(1.58,18.19) v1(1.58,16.92) v1(1.58,15.65) v1(1.58,14.38) v1(1.96,22.44) v1(2.01,13.18) v1(2.26,19.26) v1(2.48,37.26) v1(3.11,21.9) v1(3.19,12.7) v1(3.5,35.03) v1(3.5,33.76) v1(3.5,32.49) v1(3.5,31.22) v1(3.5,29.95) v1(3.5,28.68) v1(3.5,27.41) v1(3.5,26.14) v1(3.5,24.87) v1(3.51,19.5) v1(3.5,16.47) v1(3.5,15.2) v1(4.1,17.59) v1(4.2,23.82) v1(4.38,21.9) v1(4.46,12.7) v1(4.62,14.61) v1(4.72,35.37) v1(4.78,19.5) v1(5.37,17.59) v1(5.47,23.82) v1(5.65,21.9) v1(5.73,12.7) v1(5.84,41.4) v1(5.84,40.39) v1(5.84,28.7) v1(5.84,27.69) v1(5.89,14.61) v1(5.99,35.37) v1(6.05,19.5) v1(6.64,17.59) v1(6.66,53.34) v1(6.66,52.07) v1(6.66,50.8) v1(6.66,49.53) v1(6.66,48.26) v1(6.66,46.99) v1(6.66,45.72) v1(6.66,44.45) v1(6.66,43.18) v1(6.66,30.09) v1(6.74,23.82) v1(6.88,31.34) v1(6.92,21.9) v1(7,12.7) v1(7.11,38.86) v1(7.11,26.16) v1(7.16,14.61) v1(7.26,35.37) v1(7.32,19.5) v1(7.54,54.26) v1(7.56,37.28) v1(7.77,32.24) v1(7.91,17.59) v1(8.01,23.82) v1(8.13,38.86) v1(8.13,26.16) v1(8.19,21.9) v1(8.27,12.7) v1(8.43,14.61) v1(8.53,35.37) v1(8.58,52.07) v1(8.58,50.8) v1(8.58,49.53) v1(8.58,48.26) v1(8.58,46.99) v1(8.58,45.72) v1(8.58,44.45) v1(8.58,43.18) v1(8.58,29.99) v1(8.59,19.5) v1(8.67,33.14) v1(8.73,20.76) v1(8.81,54.3) v1(8.83,37.28) v1(9.2,34.29) v1(9.18,17.59) v1(9.28,23.82) v1(9.4,41.4) v1(9.4,40.39) v1(9.4,28.7) v1(9.4,27.69) v1(9.46,12.26) v1(9.46,10.99) v1(9.46,9.72) v1(9.46,8.45) v1(9.46,7.18) v1(9.46,5.91) v1(9.5,4.64) v1(9.7,14.61) v1(9.8,52.38) v1(10.08,54.3) v1(10.31,18.17) v1(10.37,23.17) v1(10.4,3.75) v1(10.64,21.93) v1(10.64,20.66) v1(10.64,19.39) v1(11.05,36.43) v1(10.98,28.89) v1(10.98,27.62) v1(10.98,23.81) v1(10.98,17.46) v1(10.98,16.19) v1(10.98,14.92) v1(11.07,52.38) v1(11.12,35.17) v1(11.12,33.9) v1(11.35,54.3) v1(11.3,2.85) v1(11.37,6.65) v1(11.46,5.38) v1(12.34,52.38) v1(12.26,6.46) v1(12.52,34.7) v1(12.62,54.3) v1(12.57,4.77) v1(12.57,2.85) v1(12.76,51.19) v1(12.76,49.92) v1(12.76,48.65) v1(12.76,47.38) v1(12.76,46.11) v1(12.76,44.84) v1(12.76,43.57) v1(12.76,42.3) v1(12.76,41.03) v1(12.76,39.76) v1(12.76,38.49) v1(12.76,37.22) v1(12.76,35.95) v1(12.89,32.29) v1(12.89,31.02) v1(12.89,29.75) v1(12.89,28.48) v1(12.89,27.21) v1(12.89,25.94) v1(12.89,24.67) v1(12.89,23.4) v1(12.89,22.13) v1(12.89,20.86) v1(12.89,19.59) v1(12.89,18.32) v1(12.89,17.05) v1(12.89,15.78) v1(12.89,14.51) v1(12.89,13.24) v1(12.89,11.97) v1(12.89,10.7) v1(12.89,9.43) v1(13.22,8.2) v1(13.15,5.56) v1(13.75,33.23) v1(13.88,54.17) v1(14.11,7.31) v1(14.65,34.12) v1(14.67,53.17) v1(14.67,51.9) v1(14.67,50.63) v1(14.67,49.36) v1(14.67,48.09) v1(14.67,46.82) v1(14.67,45.55) v1(14.67,44.28) v1(14.67,43.01) v1(14.67,41.74) v1(14.67,40.47) v1(14.67,39.2) v1(14.67,37.93) v1(14.67,36.66) v1(14.67,35.39) v1(15.05,56.61) v1(15.05,55.34) v1(15.05,54.07) v1(15.05,32.48) v1(15.05,31.21) v1(15.05,29.94) v1(15.05,28.67) v1(15.05,27.4) v1(15.05,26.13) v1(15.05,24.86) v1(15.05,23.59) v1(15.05,22.32) v1(15.05,21.05) v1(15.05,19.78) v1(15.05,18.51) v1(15.05,17.24) v1(15.05,15.97) v1(15.05,14.7) v1(15.05,13.43) v1(15.05,12.16) v1(15.05,10.89) v1(15.05,9.62) v1(15.05,8.35) v1(15.05,7.08) v1(15.91,57.54) v1(16.96,54.51) v1(16.96,53.24) v1(16.96,51.97) v1(16.96,50.7) v1(16.96,49.43) v1(16.96,48.16) v1(16.96,46.89) v1(16.96,45.62) v1(16.96,44.35) v1(16.96,43.08) v1(16.96,41.81) v1(16.96,40.54) v1(16.96,39.27) v1(16.96,36.73) v1(16.96,35.46) v1(16.96,34.19) v1(16.96,32.92) v1(16.96,31.65) v1(16.96,27.84) v1(17.02,22.35) v1(17.02,20.83) v1(17.02,17.27) v1(17.08,15.97) v1(17.08,14.7) v1(17.08,13.43) v1(17.08,12.16) v1(17.08,10.89) v1(17.08,9.62) v1(17.08,8.35) v1(17.17,57.6) v1(17.42,55.69) v1(17.66,23.56) v1(17.78,18.29) v1(18.03,21.84) v1(18.03,11.43) v1(17.97,9.86) v1(17.97,8.59) v1(18.13,12.62) v1(18.44,57.6) v1(18.54,41.4) v1(18.54,40.39) v1(18.54,28.7) v1(18.54,27.69) v1(18.69,55.69) v1(18.8,19.3) v1(18.93,23.56) v1(19.03,13.52) v1(19.36,54.61) v1(19.36,53.34) v1(19.36,52.07) v1(19.36,50.8) v1(19.36,49.53) v1(19.36,48.26) v1(19.36,46.99) v1(19.36,45.72) v1(19.36,44.45) v1(19.36,43.18) v1(19.36,35.56) v1(19.36,34.29) v1(19.36,33.02) v1(19.36,31.75) v1(19.36,30.48) v1(19.71,57.6) v1(19.81,38.86) v1(19.81,26.16) v1(19.81,20.32) v1(19.94,36.69) v1(19.93,14.42) v1(20.2,23.56) v1(20.83,38.86) v1(20.83,26.16) v1(20.83,21.34) v1(20.83,15.32) v1(20.88,57.09) v1(21.17,37.02) v1(21.28,55.88) v1(21.28,54.61) v1(21.28,53.34) v1(21.28,52.07) v1(21.28,50.8) v1(21.28,49.53) v1(21.28,48.26) v1(21.28,46.99) v1(21.28,45.72) v1(21.28,44.45) v1(21.28,43.18) v1(21.28,34.29) v1(21.28,33.02) v1(21.28,31.75) v1(21.28,30.48) v1(21.28,12.66) v1(21.28,11.39) v1(21.28,10.12) v1(21.28,8.85) v1(21.47,23.56) v1(21.72,16.22) v1(21.84,21.59) v1(22.1,41.4) v1(22.1,40.39) v1(22.1,28.7) v1(22.1,27.69) v1(22.24,35.11) v1(22.57,17.06) v1(22.6,13.69) v1(22.6,12.42) v1(22.6,11.15) v1(22.6,9.88) v1(22.6,8.61) v1(22.74,23.56) v1(23.37,21.59) v1(23.51,35.11) v1(23.47,17.96) v1(23.5,14.69) v1(24.01,23.56) v1(24.19,42.01) v1(24.19,40.74) v1(24.19,39.47) v1(24.35,15.53) v1(24.36,18.85) v1(24.51,11.49) v1(24.51,10.22) v1(24.51,8.95) v1(24.51,7.68) v1(24.66,44.46) v1(24.76,35.35) v1(24.89,21.59) v1(25.25,16.43) v1(25.25,23.81) v1(25.26,19.75) v1(25.59,12.85) v1(25.59,11.58) v1(25.59,10.31) v1(25.59,9.04) v1(25.66,36.25) v1(25.85,44.9) v1(25.91,21.59) v1(25.97,35.01) v1(25.97,33.74) v1(25.97,32.47) v1(25.97,31.2) v1(25.97,29.93) v1(25.97,28.66) v1(25.97,27.39) v1(25.97,26.12) v1(25.97,24.85) v1(26.14,17.33) v1(26.16,20.65) v1(26.49,6.59) v1(27.04,18.23) v1(27.11,44.75) v1(27.06,21.55) v1(27.39,7.49) v1(27.54,54.7) v1(27.49,53.43) v1(27.49,52.16) v1(27.49,50.89) v1(27.49,49.62) v1(27.49,48.35) v1(27.49,47.08) v1(27.49,45.81) v1(27.5,13.84) v1(27.5,12.57) v1(27.5,11.3) v1(27.5,10.03) v1(27.5,8.76) v1(27.69,15.24) v1(28.07,19.26) v1(28.2,104.59) v1(28.2,102.68) v1(28.3,16.28) v1(28.47,55.57) v1(28.92,20.11) v1(29.19,17.18) v1(29.4,53.4) v1(29.4,52.13) v1(29.4,50.86) v1(29.4,49.59) v1(29.4,48.32) v1(29.4,47.05) v1(29.4,45.78) v1(29.4,44.51) v1(29.4,41.97) v1(29.4,40.7) v1(29.4,39.43) v1(29.4,36.89) v1(29.4,35.62) v1(29.4,34.35) v1(29.4,33.08) v1(29.4,31.81) v1(29.4,28) v1(29.47,104.59) v1(29.47,102.68) v1(29.74,55.57) v1(29.82,21.01) v1(29.94,17.92) v1(30.65,53.65) v1(30.74,104.59) v1(30.71,21.9) v1(30.84,18.82) v1(31.01,55.57) v1(31.24,41.4) v1(31.24,40.39) v1(31.24,28.7) v1(31.24,27.69) v1(31.73,19.72) v1(31.92,53.65) v1(32.01,104.59) v1(32,22.35) v1(32.06,52.39) v1(32.06,51.12) v1(32.06,49.85) v1(32.06,48.58) v1(32.06,47.31) v1(32.06,46.04) v1(32.06,44.77) v1(32.06,43.5) v1(32.06,36.37) v1(32.06,35.1) v1(32.06,33.83) v1(32.06,32.56) v1(32.06,31.29) v1(32.06,30.02) v1(32.18,24.58) v1(32.28,55.57) v1(32.51,38.86) v1(32.51,26.16) v1(32.77,19.81) v1(32.96,37.27) v1(33.04,8.23) v1(33.04,6.96) v1(33.04,5.69) v1(33.04,4.42) v1(33.04,3.15) v1(33.28,104.59) v1(33.27,22.35) v1(33.27,9.48) v1(33.48,55.15) v1(33.53,38.86) v1(33.53,26.16) v1(33.45,24.58) v1(33.87,19.87) v1(33.98,53.98) v1(33.98,52.71) v1(33.98,51.44) v1(33.98,50.17) v1(33.98,48.9) v1(33.98,47.63) v1(33.98,46.36) v1(33.98,45.09) v1(33.98,43.82) v1(33.98,34.42) v1(33.98,33.15) v1(33.98,31.88) v1(33.98,30.61) v1(34.17,10.38) v1(34.55,104.59) v1(34.55,102.68) v1(34.54,22.35) v1(34.8,41.4) v1(34.8,40.39) v1(34.82,35.37) v1(34.8,28.7) v1(34.8,27.69) v1(34.95,7.38) v1(34.95,6.11) v1(34.95,4.84) v1(34.95,3.57) v1(35.14,19.87) v1(35.07,11.28) v1(35.13,8.64) v1(35.82,104.59) v1(35.82,102.68) v1(35.81,22.35) v1(35.97,12.17) v1(36.03,9.54) v1(36.09,35.37) v1(36.41,19.87) v1(36.64,41.66) v1(36.64,40.39) v1(36.87,13.07) v1(36.93,10.43) v1(37.09,104.59) v1(37.09,102.68) v1(37.19,42.8) v1(37.17,25.06) v1(37.19,9.63) v1(37.19,8.36) v1(37.34,22.35) v1(37.36,35.37) v1(37.59,101.03) v1(37.59,99.12) v1(37.68,19.87) v1(37.76,13.97) v1(37.88,11.3) v1(38.07,25.96) v1(38.36,104.59) v1(38.36,102.68) v1(38.41,43.15) v1(38.41,36.07) v1(38.41,34.8) v1(38.41,33.53) v1(38.41,32.26) v1(38.41,30.99) v1(38.41,29.72) v1(38.41,28.45) v1(38.41,27.18) v1(38.66,14.87) v1(38.82,22.8) v1(38.78,12.19) v1(38.86,101.03) v1(38.86,99.12) v1(38.95,19.87) v1(39.63,104.59) v1(39.63,102.68) v1(39.62,23.88) v1(39.56,15.77) v1(39.66,42.91) v1(39.68,13.09) v1(39.94,48.94) v1(39.94,47.67) v1(39.94,46.4) v1(39.94,45.13) v1(39.94,43.86) v1(40.13,101.03) v1(40.06,50.21) v1(40.22,19.87) v1(40.46,16.66) v1(40.58,13.99) v1(40.9,104.59) v1(40.9,102.68) v1(40.93,11.3) v1(41.06,50.99) v1(41.15,20.83) v1(41.4,101.03) v1(41.36,17.56) v1(41.47,14.89) v1(41.85,48.01) v1(41.85,46.74) v1(41.85,45.47) v1(41.85,44.2) v1(41.85,41.66) v1(41.85,40.39) v1(41.85,39.12) v1(41.85,34.04) v1(41.85,32.77) v1(41.85,27.69) v1(41.83,12.19) v1(41.91,21.84) v1(42.17,104.59) v1(42.17,102.68) v1(42.16,23.37) v1(42.33,50.99) v1(42.26,18.46) v1(42.37,15.79) v1(42.53,49.08) v1(42.58,34.86) v1(42.67,101.03) v1(42.67,99.12) v1(42.73,13.09) v1(43.15,19.36) v1(43.27,16.68) v1(43.44,104.59) v1(43.44,102.68) v1(43.6,50.99) v1(43.62,13.99) v1(43.8,49.08) v1(43.85,34.86) v1(43.94,101.03) v1(43.94,99.12) v1(43.94,41.4) v1(43.94,40.39) v1(43.94,28.7) v1(43.94,27.69) v1(44.05,20.26) v1(44.17,36.77) v1(44.17,17.58) v1(44.26,11.67) v1(44.52,14.89) v1(44.71,104.59) v1(44.71,102.68) v1(44.76,48.26) v1(44.76,46.99) v1(44.76,45.72) v1(44.76,44.45) v1(44.76,43.18) v1(44.76,31.79) v1(44.76,30.52) v1(44.87,50.99) v1(44.95,21.16) v1(45.12,34.86) v1(45.07,18.48) v1(45.21,101.03) v1(45.21,99.12) v1(45.21,38.86) v1(45.21,26.16) v1(45.16,12.56) v1(45.44,36.77) v1(45.37,32.91) v1(45.42,15.79) v1(45.47,97.48) v1(45.85,22.05) v1(45.98,104.59) v1(45.98,102.68) v1(45.96,19.38) v1(46.1,50.66) v1(46.06,13.46) v1(46.23,38.86) v1(46.23,26.16) v1(46.32,16.68) v1(46.39,34.86) v1(46.48,101.03) v1(46.48,99.12) v1(46.6,33.21) v1(46.74,97.48) v1(46.74,95.56) v1(46.68,49.53) v1(46.68,48.26) v1(46.68,46.99) v1(46.68,45.72) v1(46.68,44.45) v1(46.68,43.18) v1(46.71,36.77) v1(46.68,30.86) v1(46.74,22.95) v1(46.86,20.28) v1(46.95,14.36) v1(47.02,9.06) v1(47.25,104.59) v1(47.25,102.68) v1(47.22,17.58) v1(47.5,41.4) v1(47.5,40.39) v1(47.5,28.7) v1(47.5,27.69) v1(47.64,23.85) v1(47.66,34.86) v1(47.75,101.03) v1(47.75,99.12) v1(47.76,21.17) v1(47.87,33.21) v1(47.85,15.26) v1(47.92,9.96) v1(48.01,97.48) v1(48.01,95.56) v1(48.12,18.48) v1(48.52,104.59) v1(48.52,102.68) v1(48.64,22.05) v1(48.75,16.16) v1(48.82,10.86) v1(49.02,101.03) v1(49.02,99.12) v1(49.01,19.38) v1(48.98,8.33) v1(49.08,48.76) v1(49.08,47.49) v1(49.08,46.22) v1(49.08,44.95) v1(49.08,41.14) v1(49.08,39.87) v1(49.08,28.44) v1(49.08,27.17) v1(49.28,97.48) v1(49.54,22.95) v1(49.65,17.05) v1(49.71,11.76) v1(49.79,104.59) v1(49.79,102.68) v1(49.91,20.28) v1(49.88,9.22) v1(49.95,49.68) v1(50.03,6.04) v1(50.29,101.03) v1(50.29,99.12) v1(50.55,97.48) v1(50.54,17.95) v1(50.61,12.65) v1(50.8,24.13) v1(50.81,21.17) v1(50.78,10.12) v1(50.99,46.62) v1(50.99,45.35) v1(50.99,44.08) v1(50.99,42.81) v1(50.99,41.54) v1(50.99,40.27) v1(50.99,39) v1(50.99,37.73) v1(51.06,104.59) v1(51.06,102.68) v1(51.22,49.72) v1(51.32,30.84) v1(51.32,29.57) v1(51.32,28.3) v1(51.32,27.03) v1(51.32,25.76) v1(51.29,6.16) v1(51.42,47.81) v1(51.44,18.85) v1(51.51,13.55) v1(51.56,101.03) v1(51.56,99.12) v1(51.69,22.05) v1(51.68,11.02) v1(51.82,97.48) v1(51.82,95.56) v1(51.82,37.08) v1(51.97,4.13) v1(52.19,7.06) v1(52.22,1.58) v1(52.33,104.59) v1(52.33,102.68) v1(52.34,19.75) v1(52.41,14.45) v1(52.49,49.72) v1(52.59,22.95) v1(52.58,11.92) v1(52.69,47.81) v1(52.83,101.03) v1(52.83,99.12) v1(52.86,5.03) v1(53.09,97.48) v1(53.09,95.56) v1(53.09,36.58) v1(53.09,7.96) v1(53.24,20.65) v1(53.3,15.35) v1(53.53,32.7) v1(53.47,12.81) v1(53.48,3.5) v1(53.49,1.58) v1(53.6,104.59) v1(53.6,102.68) v1(53.59,34.04) v1(53.76,49.72) v1(53.76,5.93) v1(53.86,30.84) v1(53.86,29.57) v1(53.86,28.3) v1(53.86,27.03) v1(53.86,25.76) v1(53.96,47.81) v1(53.99,8.85) v1(54.1,101.03) v1(54.1,99.12) v1(54.2,16.25) v1(54.26,21.4) v1(54.36,97.48) v1(54.36,95.56) v1(54.42,36.52) v1(54.37,13.71) v1(54.59,34.6) v1(54.66,6.83) v1(54.75,3.5) v1(54.76,1.58) v1(54.87,104.59) v1(54.87,102.68) v1(54.88,9.75) v1(55.03,49.72) v1(55.1,17.14) v1(55.23,47.81) v1(55.27,14.61) v1(55.37,101.03) v1(55.37,99.12) v1(55.37,93.92) v1(55.37,92.01) v1(55.53,21.65) v1(55.63,97.48) v1(55.63,95.56) v1(55.56,7.72) v1(55.69,36.52) v1(55.78,10.65) v1(55.86,34.6) v1(55.94,6.48) v1(55.94,5.21) v1(55.94,3.94) v1(56,18.04) v1(56.03,1.58) v1(56.14,104.59) v1(56.14,102.68) v1(56.17,15.51) v1(56.3,49.72) v1(56.5,47.81) v1(56.64,101.03) v1(56.64,99.12) v1(56.64,93.92) v1(56.64,92.01) v1(56.64,41.4) v1(56.64,40.39) v1(56.64,28.7) v1(56.64,27.69) v1(56.68,11.55) v1(56.9,97.48) v1(56.9,95.56) v1(56.9,21.84) v1(56.9,18.94) v1(56.96,36.52) v1(57.13,34.6) v1(57.07,16.41) v1(57.26,1.9) v1(57.41,104.59) v1(57.41,102.68) v1(57.46,46.99) v1(57.46,45.72) v1(57.46,44.45) v1(57.46,43.18) v1(57.46,31.75) v1(57.57,49.72) v1(57.58,12.45) v1(57.69,25.09) v1(57.79,32.98) v1(57.8,19.84) v1(57.91,101.03) v1(57.91,99.12) v1(57.91,93.92) v1(57.91,38.86) v1(57.91,26.16) v1(57.85,8.11) v1(57.85,6.84) v1(57.85,5.57) v1(57.85,4.3) v1(57.85,3.03) v1(57.97,17.31) v1(58.06,9.98) v1(58.17,97.48) v1(58.17,95.56) v1(58.23,36.52) v1(58.24,21.9) v1(58.4,34.6) v1(58.48,13.35) v1(58.68,104.59) v1(58.68,102.68) v1(58.67,20.83) v1(58.8,49.39) v1(58.93,38.86) v1(58.93,26.16) v1(58.86,18.2) v1(58.96,33.47) v1(58.96,25.09) v1(58.96,10.87) v1(59.18,101.03) v1(59.18,99.12) v1(59.18,93.92) v1(59.44,97.48) v1(59.44,95.56) v1(59.38,48.26) v1(59.38,46.99) v1(59.38,45.72) v1(59.38,44.45) v1(59.38,43.18) v1(59.38,14.24) v1(59.5,36.52) v1(59.51,21.9) v1(59.67,34.6) v1(59.76,19.1) v1(59.95,104.59) v1(59.95,102.68) v1(59.86,11.77) v1(60.2,41.4) v1(60.2,40.39) v1(60.23,33.47) v1(60.2,28.7) v1(60.2,27.69) v1(60.27,15.14) v1(60.45,101.03) v1(60.45,99.12) v1(60.45,93.92) v1(60.45,92.01) v1(60.71,97.48) v1(60.71,95.56) v1(60.77,36.52) v1(60.78,21.9) v1(60.77,19.87) v1(60.76,12.67) v1(60.94,34.6) v1(61.22,104.59) v1(61.22,102.68) v1(61.17,16.04) v1(61.5,33.47) v1(61.72,101.03) v1(61.72,99.12) v1(61.72,93.92) v1(61.72,92.01) v1(61.66,13.57) v1(61.98,97.48) v1(61.98,95.56) v1(62.04,36.52) v1(62.04,19.87) v1(62.05,21.9) v1(62.07,16.94) v1(62.21,34.6) v1(62.49,104.59) v1(62.49,102.68) v1(62.51,24.83) v1(62.59,31.56) v1(62.55,14.47) v1(62.74,33.53) v1(62.99,101.03) v1(62.99,99.12) v1(62.99,93.92) v1(62.99,92.01) v1(62.97,17.84) v1(63.25,97.48) v1(63.25,95.56) v1(63.25,36.83) v1(63.32,21.9) v1(63.31,19.87) v1(63.45,15.36) v1(63.56,45.87) v1(63.56,44.6) v1(63.56,43.33) v1(63.56,42.06) v1(63.56,40.79) v1(63.56,39.52) v1(63.56,38.25) v1(63.56,30.63) v1(63.56,29.36) v1(63.56,28.09) v1(63.56,26.82) v1(63.56,25.55) v1(63.66,47.13) v1(63.76,104.59) v1(63.76,102.68) v1(63.87,18.73) v1(64.26,101.03) v1(64.26,99.12) v1(64.26,93.92) v1(64.26,92.01) v1(64.26,90.36) v1(64.35,16.26) v1(64.52,97.48) v1(64.52,95.56) v1(64.52,19.81) v1(64.64,47.95) v1(64.59,21.9) v1(65.03,104.59) v1(65.03,102.68) v1(65.25,17.16) v1(65.53,101.03) v1(65.53,99.12) v1(65.53,93.92) v1(65.53,92.01) v1(65.53,90.36) v1(65.53,88.45) v1(65.47,45.34) v1(65.47,44.07) v1(65.47,42.8) v1(65.47,41.53) v1(65.47,40.26) v1(65.47,38.99) v1(65.47,37.72) v1(65.47,30.1) v1(65.47,28.83) v1(65.47,27.56) v1(65.47,26.29) v1(65.47,25.02) v1(65.61,19.87) v1(65.79,97.48) v1(65.79,95.56) v1(65.91,47.95) v1(65.86,21.9) v1(66.04,36.83) v1(66.02,34.6) v1(66.3,104.59) v1(66.3,102.68) v1(66.4,31.56) v1(66.53,46.03) v1(66.55,17.78) v1(66.58,33.47) v1(66.8,101.03) v1(66.8,99.12) v1(66.8,93.92) v1(66.8,92.01) v1(66.8,90.36) v1(66.88,23.82) v1(66.88,19.87) v1(67.06,97.48) v1(67.06,95.56) v1(67.12,36.52) v1(67.18,47.95) v1(67.29,34.6) v1(67.39,21.9) v1(67.57,104.59) v1(67.57,102.68) v1(67.67,31.56) v1(67.8,46.03) v1(67.85,33.47) v1(68.07,101.03) v1(68.07,99.12) v1(68.07,93.92) v1(68.07,92.01) v1(68.07,90.36) v1(68.15,19.87) v1(68.15,17.84) v1(68.15,23.82) v1(68.33,97.48) v1(68.33,95.56) v1(68.39,36.52) v1(68.45,47.95) v1(68.66,21.9) v1(68.84,104.59) v1(68.84,102.68) v1(69.07,46.03) v1(69.34,101.03) v1(69.34,99.12) v1(69.34,93.92) v1(69.34,92.01) v1(69.34,90.36) v1(69.34,41.4) v1(69.34,40.39) v1(69.34,28.7) v1(69.34,27.69) v1(69.42,23.82) v1(69.42,19.87) v1(69.42,17.84) v1(69.6,97.48) v1(69.6,95.56) v1(69.72,47.95) v1(69.93,21.9) v1(70.11,104.59) v1(70.11,102.68) v1(70.1,36.07) v1(70.16,45.39) v1(70.16,44.12) v1(70.16,42.85) v1(70.16,31.66) v1(70.16,30.39) v1(70.36,34.54) v1(70.61,101.03) v1(70.61,99.12) v1(70.61,93.92) v1(70.61,92.01) v1(70.61,90.36) v1(70.61,88.45) v1(70.61,38.86) v1(70.61,26.16) v1(70.69,23.82) v1(70.69,19.87) v1(70.69,17.84) v1(70.87,97.48) v1(70.87,95.56) v1(70.99,47.95) v1(71.2,21.9) v1(71.27,34.99) v1(71.38,104.59) v1(71.38,102.68) v1(71.63,38.86) v1(71.63,26.16) v1(71.88,101.03) v1(71.88,99.12) v1(71.88,93.92) v1(71.88,92.01) v1(71.88,90.36) v1(71.88,88.45) v1(71.97,47.14) v1(71.96,23.82) v1(71.96,19.87) v1(71.96,17.84) v1(72.14,97.48) v1(72.14,95.56) v1(72.08,45.87) v1(72.08,44.6) v1(72.08,43.33) v1(72.08,42.06) v1(72.08,31.86) v1(72.08,30.59) v1(72.42,33.08) v1(72.54,34.99) v1(72.47,21.9) v1(72.65,104.59) v1(72.65,102.68) v1(72.9,41.4) v1(72.9,40.39) v1(72.9,28.7) v1(72.9,27.69) v1(73.15,101.03) v1(73.15,99.12) v1(73.15,93.92) v1(73.15,92.01) v1(73.15,90.36) v1(73.15,88.45) v1(73.15,86.81) v1(73.23,19.87) v1(73.23,17.84) v1(73.41,97.48) v1(73.41,95.56) v1(73.69,33.08) v1(73.74,21.9) v1(73.81,34.99) v1(73.92,104.59) v1(73.92,102.68) v1(74.42,101.03) v1(74.42,99.12) v1(74.42,93.92) v1(74.42,92.01) v1(74.42,90.36) v1(74.42,88.45) v1(74.42,86.81) v1(74.42,84.9) v1(74.5,19.87) v1(74.5,17.84) v1(74.68,97.48) v1(74.68,95.56) v1(75.19,104.59) v1(75.19,102.68) v1(75.24,41.71) v1(75.24,40.44) v1(75.24,39.17) v1(75.24,37.9) v1(75.24,36.63) v1(75.24,35.36) v1(75.24,32.82) v1(75.24,31.55) v1(75.24,30.28) v1(75.24,29.01) v1(75.24,27.74) v1(75.24,26.47) v1(75.51,22.34) v1(75.69,101.03) v1(75.69,99.12) v1(75.69,93.92) v1(75.69,92.01) v1(75.69,90.36) v1(75.69,88.45) v1(75.69,86.81) v1(75.69,84.9) v1(75.77,19.87) v1(75.77,17.84) v1(75.95,97.48) v1(75.95,95.56) v1(75.86,42.82) v1(76.41,23.24) v1(76.46,104.59) v1(76.46,102.68) v1(76.9,20.94) v1(76.96,101.03) v1(76.96,99.12) v1(76.96,93.92) v1(76.96,92.01) v1(76.96,90.36) v1(76.96,88.45) v1(76.96,86.81) v1(77.04,19.87) v1(77.04,17.84) v1(77.09,43.12) v1(77.22,97.48) v1(77.22,95.56) v1(77.16,40.52) v1(77.16,39.25) v1(77.16,37.98) v1(77.16,36.71) v1(77.16,35.44) v1(77.3,24.14) v1(77.73,104.59) v1(77.73,102.68) v1(77.8,21.83) v1(78.04,35.72) v1(78.23,101.03) v1(78.23,99.12) v1(78.23,93.92) v1(78.23,92.01) v1(78.23,90.36) v1(78.23,88.45) v1(78.23,86.81) v1(78.22,41.21) v1(78.31,19.87) v1(78.31,17.84) v1(78.36,43.12) v1(78.49,97.48) v1(78.49,95.56) v1(78.58,36.87) v1(78.69,22.73) v1(79,104.59) v1(79,102.68) v1(78.96,40.18) v1(79.5,101.03) v1(79.5,99.12) v1(79.5,93.92) v1(79.5,92.01) v1(79.5,90.36) v1(79.5,88.45) v1(79.5,86.81) v1(79.5,84.9) v1(79.59,23.63) v1(79.58,19.87) v1(79.58,17.84) v1(79.76,97.48) v1(79.76,95.56) v1(79.95,35.01) v1(79.95,33.74) v1(79.95,32.47) v1(79.95,28.66) v1(79.95,27.39) v1(80.27,104.59) v1(80.27,102.68) v1(80.77,101.03) v1(80.77,99.12) v1(80.77,93.92) v1(80.77,92.01) v1(80.77,90.36) v1(80.77,88.45) v1(80.77,86.81) v1(80.77,84.9) v1(80.85,19.87) v1(80.85,17.84) v1(81.03,97.48) v1(81.03,95.56) v1(81.18,35.32) v1(81.54,104.59) v1(81.54,102.68) v1(82.04,101.03) v1(82.04,99.12) v1(82.04,93.92) v1(82.04,92.01) v1(82.04,90.36) v1(82.04,88.45) v1(82.04,86.81) v1(82.04,84.9) v1(82.04,28.7) v1(82.04,27.69) v1(82.12,19.87) v1(82.12,17.84) v1(82.3,97.48) v1(82.3,95.56) v1(82.45,35.32) v1(82.81,104.59) v1(82.81,102.68) v1(82.86,34.12) v1(82.86,32.85) v1(82.86,31.58) v1(82.86,30.31) v1(83.31,101.03) v1(83.31,99.12) v1(83.31,93.92) v1(83.31,92.01) v1(83.31,90.36) v1(83.31,88.45) v1(83.31,86.81) v1(83.31,84.9) v1(83.31,42.42) v1(83.31,38.86) v1(83.31,26.16) v1(83.39,17.84) v1(83.57,97.48) v1(83.57,95.56) v1(83.61,37.23) v1(83.57,20.07) v1(84.08,104.59) v1(84.08,102.68) v1(84.33,42.42) v1(84.33,38.86) v1(84.33,26.16) v1(84.58,101.03) v1(84.58,99.12) v1(84.58,93.92) v1(84.58,92.01) v1(84.58,90.36) v1(84.58,88.45) v1(84.58,86.81) v1(84.58,84.9) v1(84.63,36.47) v1(84.69,20.77) v1(84.66,17.84) v1(84.84,97.48) v1(84.84,95.56) v1(84.78,35.21) v1(84.78,33.94) v1(84.78,32.67) v1(84.78,31.4) v1(84.78,30.13) v1(85.35,104.59) v1(85.35,102.68) v1(85.6,41.15) v1(85.6,40.13) v1(85.6,28.7) v1(85.6,27.69) v1(85.59,21.66) v1(85.85,101.03) v1(85.85,99.12) v1(85.85,93.92) v1(85.85,92.01) v1(85.85,90.36) v1(85.85,88.45) v1(85.85,86.81) v1(85.85,84.9) v1(85.93,17.84) v1(86.11,97.48) v1(86.11,95.56) v1(86.49,22.56) v1(86.62,104.59) v1(86.62,102.68) v1(87.12,101.03) v1(87.12,99.12) v1(87.12,93.92) v1(87.12,92.01) v1(87.12,90.36) v1(87.12,88.45) v1(87.12,86.81) v1(87.12,84.9) v1(87.12,20.07) v1(87.2,17.84) v1(87.38,97.48) v1(87.38,95.56) v1(87.39,23.46) v1(87.89,104.59) v1(87.89,102.68) v1(88.28,24.36) v1(88.39,101.03) v1(88.39,99.12) v1(88.39,93.92) v1(88.39,92.01) v1(88.39,90.36) v1(88.39,88.45) v1(88.39,86.81) v1(88.39,84.9) v1(88.47,17.87) v1(88.65,97.48) v1(88.65,95.56) v1(88.9,83.88) v1(89.16,104.59) v1(89.16,102.68) v1(89.15,81.59) v1(89.18,25.26) v1(89.35,18.79) v1(89.41,22.1) v1(89.41,19.81) v1(89.47,29.03) v1(89.47,27.76) v1(89.47,26.49) v1(89.64,30.29) v1(89.66,101.03) v1(89.66,99.12) v1(89.66,93.92) v1(89.66,92.01) v1(89.66,90.36) v1(89.66,88.45) v1(89.66,86.81) v1(89.66,84.9) v1(89.92,97.48) v1(89.92,95.56) v1(89.92,23.37) v1(90.17,83.88) v1(90.43,104.59) v1(90.43,102.68) v1(90.42,81.59) v1(90.54,31.19) v1(90.68,22.1) v1(90.68,20.07) v1(90.79,24.17) v1(90.93,101.03) v1(90.93,99.12) v1(90.93,93.92) v1(90.93,92.01) v1(90.93,90.36) v1(90.93,88.45) v1(90.93,86.81) v1(90.93,84.9) v1(91.19,97.48) v1(91.19,95.56) v1(91.44,83.88) v1(91.44,32.09) v1(91.38,29.1) v1(91.38,27.83) v1(91.38,26.56) v1(91.38,25.29) v1(91.7,104.59) v1(91.7,102.68) v1(91.69,81.59) v1(91.95,22.1) v1(91.95,20.07) v1(92.2,101.03) v1(92.2,99.12) v1(92.2,93.92) v1(92.2,92.01) v1(92.2,90.36) v1(92.2,88.45) v1(92.2,86.81) v1(92.2,84.9) v1(92.16,30.1) v1(92.34,32.98) v1(92.46,97.48) v1(92.46,95.56) v1(92.71,83.88) v1(92.97,104.59) v1(92.97,102.68) v1(92.96,81.59) v1(93.24,33.88) v1(93.22,22.1) v1(93.38,19.93) v1(93.47,101.03) v1(93.47,99.12) v1(93.47,93.92) v1(93.47,92.01) v1(93.47,90.36) v1(93.47,88.45) v1(93.47,86.81) v1(93.47,84.9) v1(93.73,97.48) v1(93.73,95.56) v1(93.98,83.88) v1(94.13,34.78) v1(94.24,104.59) v1(94.24,102.68) v1(94.23,81.59) v1(94.64,19.87) v1(94.74,101.03) v1(94.74,99.12) v1(94.74,93.92) v1(94.74,92.01) v1(94.74,90.36) v1(94.74,88.45) v1(94.74,86.81) v1(94.74,84.9) v1(94.74,40.89) v1(94.74,39.88) v1(94.74,28.19) v1(94.74,27.18) v1(94.85,32.8) v1(94.89,21.78) v1(95,97.48) v1(95,95.56) v1(95.03,35.68) v1(95.25,83.88) v1(95.51,104.59) v1(95.51,102.68) v1(95.5,81.59) v1(95.56,38.1) v1(95.56,36.83) v1(95.56,25.4) v1(95.56,24.13) v1(95.56,22.86) v1(95.75,33.7) v1(95.91,19.87) v1(96.01,101.03) v1(96.01,99.12) v1(96.01,93.92) v1(96.01,92.01) v1(96.01,90.36) v1(96.01,88.45) v1(96.01,86.81) v1(96.01,84.9) v1(96.01,42.42) v1(96.01,29.72) v1(96.27,97.48) v1(96.27,95.56) v1(96.52,83.88) v1(96.65,34.59) v1(96.78,104.59) v1(96.78,102.68) v1(96.77,81.59) v1(97.03,42.42) v1(97.03,29.72) v1(97.08,20.38) v1(97.28,101.03) v1(97.28,99.12) v1(97.28,93.92) v1(97.28,92.01) v1(97.28,90.36) v1(97.28,88.45) v1(97.28,86.81) v1(97.28,84.9) v1(97.54,97.48) v1(97.54,95.56) v1(97.48,38.1) v1(97.48,36.83) v1(97.48,35.56) v1(97.48,25.4) v1(97.48,24.13) v1(97.48,22.86) v1(97.48,21.59) v1(97.79,83.88) v1(98.05,104.59) v1(98.05,102.68) v1(98.04,81.59) v1(98.3,40.89) v1(98.3,39.88) v1(98.3,28.19) v1(98.3,27.18) v1(98.55,101.03) v1(98.55,99.12) v1(98.55,93.92) v1(98.55,92.01) v1(98.55,90.36) v1(98.55,88.45) v1(98.55,86.81) v1(98.55,84.9) v1(98.81,97.48) v1(98.81,95.56) v1(99.06,83.88) v1(99.32,104.59) v1(99.32,102.68) v1(99.31,81.59) v1(99.82,101.03) v1(99.82,99.12) v1(99.82,93.92) v1(99.82,92.01) v1(99.82,90.36) v1(99.82,88.45) v1(99.82,86.81) v1(99.82,84.9) v1(100.08,97.48) v1(100.08,95.56) v1(100.33,83.88) v1(100.33,18.03) v1(100.59,104.59) v1(100.59,102.68) v1(100.58,81.59) v1(101.09,101.03) v1(101.09,99.12) v1(101.09,93.92) v1(101.09,92.01) v1(101.09,90.36) v1(101.09,88.45) v1(101.09,86.81) v1(101.09,84.9) v1(101.35,97.48) v1(101.35,95.56) v1(101.35,19.05) v1(101.6,83.88) v1(101.86,104.59) v1(101.86,102.68) v1(101.85,81.59) v1(102.11,16.51) v1(102.17,78.23) v1(102.17,76.96) v1(102.17,70.61) v1(102.17,69.34) v1(102.17,68.07) v1(102.17,66.8) v1(102.17,65.53) v1(102.17,64.26) v1(102.17,62.99) v1(102.17,61.72) v1(102.17,60.45) v1(102.17,59.18) v1(102.17,57.91) v1(102.17,56.64) v1(102.17,55.37) v1(102.17,54.1) v1(102.17,52.83) v1(102.17,51.56) v1(102.17,50.29) v1(102.17,49.02) v1(102.17,47.75) v1(102.17,46.48) v1(102.17,45.21) v1(102.17,43.94) v1(102.17,42.67) v1(102.17,41.4) v1(102.17,40.13) v1(102.17,38.86) v1(102.17,37.59) v1(102.17,36.32) v1(102.17,35.05) v1(102.17,33.78) v1(102.17,32.51) v1(102.17,31.24) v1(102.17,29.97) v1(102.17,28.7) v1(102.17,27.43) v1(102.17,26.16) v1(102.17,24.89) v1(102.17,23.62) v1(102.17,22.35) v1(102.17,21.08) v1(102.17,19.81) v1(102.36,101.03) v1(102.36,99.12) v1(102.36,93.92) v1(102.36,92.01) v1(102.36,90.36) v1(102.36,88.45) v1(102.36,86.81) v1(102.36,84.9) v1(102.62,97.48) v1(102.62,95.56) v1(103.13,104.59) v1(103.13,102.68) v1(103.12,17.53) v1(103.38,84.07) v1(103.63,101.03) v1(103.63,93.92) v1(103.63,90.36) v1(103.63,86.81) v1(103.89,97.48) v1(104.08,79.5) v1(104.08,78.23) v1(104.08,76.96) v1(104.08,75.69) v1(104.08,74.42) v1(104.08,73.15) v1(104.08,71.88) v1(104.08,70.61) v1(104.08,69.34) v1(104.08,68.07) v1(104.08,66.8) v1(104.08,65.53) v1(104.08,64.26) v1(104.08,62.99) v1(104.08,61.72) v1(104.08,60.45) v1(104.08,59.18) v1(104.08,57.91) v1(104.08,56.64) v1(104.08,55.37) v1(104.08,54.1) v1(104.08,52.83) v1(104.08,51.56) v1(104.08,50.29) v1(104.08,49.02) v1(104.08,47.75) v1(104.08,46.48) v1(104.08,45.21) v1(104.08,43.94) v1(104.08,42.67) v1(104.08,41.4) v1(104.08,40.13) v1(104.08,38.86) v1(104.08,37.59) v1(104.08,36.32) v1(104.08,35.05) v1(104.08,33.78) v1(104.08,32.51) v1(104.08,31.24) v1(104.08,29.97) v1(104.08,28.7) v1(104.08,27.43) v1(104.08,26.16) v1(104.08,24.89) v1(104.08,23.62) v1(104.08,22.35) v1(104.08,21.08) v1(104.08,19.81) v1(104.14,18.54) v1(104.4,104.59) v1(104.39,83.31) v1(104.65,100.84) v1(104.65,86.61) v1(104.65,15.24) v1(104.9,97.03) v1(104.9,93.47) v1(104.9,89.92) v1(104.96,78.23) v1(104.96,76.96) v1(104.96,75.69) v1(104.96,74.42) v1(104.96,73.15) v1(104.96,71.88) v1(104.96,70.61) v1(104.96,69.34) v1(104.96,68.07) v1(104.96,66.8) v1(104.96,65.53) v1(104.96,64.26) v1(104.96,62.99) v1(104.96,61.72) v1(104.96,60.45) v1(104.96,59.18) v1(104.96,57.91) v1(104.96,56.64) v1(104.96,55.37) v1(104.96,54.1) v1(104.96,52.83) v1(104.96,51.56) v1(104.96,50.29) v1(104.96,49.02) v1(104.96,47.75) v1(104.96,46.48) v1(104.96,45.21) v1(104.96,43.94) v1(104.96,42.67) v1(104.96,41.4) v1(104.96,40.13) v1(104.96,38.86) v1(104.96,37.59) v1(104.96,36.32) v1(104.96,35.05) v1(104.96,33.78) v1(104.96,32.51) v1(104.96,31.24) v1(104.96,29.97) v1(104.96,28.7) v1(104.96,27.43) v1(104.96,26.16) v1(104.96,24.89) v1(104.96,23.62) v1(104.96,22.35) v1(104.96,21.08) v1(104.96,19.81) v1(105.16,103.89) v1(105.16,82.55) v1(105.41,100.08) v1(105.41,85.85) v1(105.66,96.27) v1(105.66,92.71) v1(105.66,89.15) v1(105.66,16.26) v1(105.92,103.12) v1(105.92,81.79) v1(106.17,99.31) v1(106.17,85.09) v1(106.43,95.5) v1(106.43,91.95) v1(106.43,88.39) v1(106.68,102.36) v1(106.68,81.03) v1(106.68,17.27) v1(106.93,98.55) v1(106.93,84.33) v1(106.87,79.5) v1(106.87,78.23) v1(106.87,76.96) v1(106.87,75.69) v1(106.87,74.42) v1(106.87,73.15) v1(106.87,71.88) v1(106.87,70.61) v1(106.87,69.34) v1(106.87,68.07) v1(106.87,66.8) v1(106.87,65.53) v1(106.87,64.26) v1(106.87,62.99) v1(106.87,61.72) v1(106.87,60.45) v1(106.87,59.18) v1(106.87,57.91) v1(106.87,56.64) v1(106.87,55.37) v1(106.87,54.1) v1(106.87,52.83) v1(106.87,51.56) v1(106.87,50.29) v1(106.87,49.02) v1(106.87,47.75) v1(106.87,46.48) v1(106.87,45.21) v1(106.87,43.94) v1(106.87,42.67) v1(106.87,41.4) v1(106.87,40.13) v1(106.87,38.86) v1(106.87,37.59) v1(106.87,36.32) v1(106.87,35.05) v1(106.87,33.78) v1(106.87,32.51) v1(106.87,31.24) v1(106.87,29.97) v1(106.87,28.7) v1(106.87,27.43) v1(106.87,26.16) v1(106.87,24.89) v1(106.87,23.62) v1(106.87,22.35) v1(106.87,21.08) v1(106.87,19.81) v1(106.87,18.54) v1(107.19,94.74) v1(107.19,91.19) v1(107.19,87.63) v1(107.44,101.6) v1(107.44,80.26) v1(107.44,14.22) v1(107.7,97.79) v1(107.7,83.57) v1(107.95,93.98) v1(107.95,90.42) v1(107.95,86.87) v1(108.01,79.5) v1(108.01,78.23) v1(108.01,76.96) v1(108.01,75.69) v1(108.01,74.42) v1(108.01,73.15) v1(108.01,71.88) v1(108.01,70.61) v1(108.01,69.34) v1(108.01,68.07) v1(108.01,66.8) v1(108.01,65.53) v1(108.01,64.26) v1(108.01,62.99) v1(108.01,61.72) v1(108.01,60.45) v1(108.01,59.18) v1(108.01,57.91) v1(108.01,56.64) v1(108.01,55.37) v1(108.01,54.1) v1(108.01,52.83) v1(108.01,51.56) v1(108.01,50.29) v1(108.01,49.02) v1(108.01,47.75) v1(108.01,46.48) v1(108.01,45.21) v1(108.01,43.94) v1(108.01,42.67) v1(108.01,41.4) v1(108.01,40.13) v1(108.01,38.86) v1(108.01,37.59) v1(108.01,36.32) v1(108.01,35.05) v1(108.01,33.78) v1(108.01,32.51) v1(108.01,31.24) v1(108.01,29.97) v1(108.01,28.7) v1(108.01,27.43) v1(108.01,26.16) v1(108.01,24.89) v1(108.01,23.62) v1(108.01,22.35) v1(108.01,21.08) v1(108.01,19.81) v1(108.01,18.54) v1(108.2,100.84) v1(108.46,97.03) v1(108.46,82.8) v1(108.46,15.24) v1(108.71,93.22) v1(108.71,89.66) v1(108.71,86.11) v1(108.97,100.08) v1(109.22,96.27) v1(109.22,82.04) v1(109.47,92.46) v1(109.47,88.9) v1(109.47,85.34) v1(109.47,16.26) v1(109.73,99.31) v1(109.73,12.45) v1(109.92,80.77) v1(109.92,79.5) v1(109.92,78.23) v1(109.92,76.96) v1(109.92,75.69) v1(109.92,74.42) v1(109.92,73.15) v1(109.92,71.88) v1(109.92,70.61) v1(109.92,69.34) v1(109.92,68.07) v1(109.92,66.8) v1(109.92,65.53) v1(109.92,64.26) v1(109.92,62.99) v1(109.92,61.72) v1(109.92,60.45) v1(109.92,59.18) v1(109.92,57.91) v1(109.92,56.64) v1(109.92,55.37) v1(109.92,54.1) v1(109.92,52.83) v1(109.92,51.56) v1(109.92,50.29) v1(109.92,49.02) v1(109.92,47.75) v1(109.92,46.48) v1(109.92,45.21) v1(109.92,43.94) v1(109.92,42.67) v1(109.92,41.4) v1(109.92,40.13) v1(109.92,38.86) v1(109.92,37.59) v1(109.92,36.32) v1(109.92,35.05) v1(109.92,33.78) v1(109.92,32.51) v1(109.92,31.24) v1(109.92,29.97) v1(109.92,28.7) v1(109.92,27.43) v1(109.92,26.16) v1(109.92,24.89) v1(109.92,23.62) v1(109.92,22.35) v1(109.92,21.08) v1(109.92,19.81) v1(109.92,18.54) v1(109.98,95.5) v1(110.24,91.69) v1(110.24,88.14) v1(110.24,84.58) v1(110.49,98.55) v1(110.49,17.53) v1(110.74,94.74) v1(110.74,13.46) v1(111,90.93) v1(111,87.38) v1(111,83.82) v1(111.06,80.52) v1(111.06,79.25) v1(111.06,77.98) v1(111.06,76.71) v1(111.06,75.44) v1(111.06,74.17) v1(111.06,72.9) v1(111.06,71.63) v1(111.06,70.36) v1(111.06,69.09) v1(111.06,67.82) v1(111.06,66.55) v1(111.06,65.28) v1(111.06,64.01) v1(111.06,62.74) v1(111.06,61.47) v1(111.06,60.2) v1(111.06,58.93) v1(111.06,57.66) v1(111.06,56.39) v1(111.06,55.12) v1(111.06,53.85) v1(111.06,52.58) v1(111.06,51.31) v1(111.06,50.04) v1(111.06,48.77) v1(111.06,47.5) v1(111.06,46.23) v1(111.06,44.96) v1(111.06,43.69) v1(111.06,42.42) v1(111.06,41.15) v1(111.06,39.88) v1(111.06,38.61) v1(111.06,37.34) v1(111.06,36.07) v1(111.06,34.8) v1(111.06,33.53) v1(111.06,32.26) v1(111.06,30.99) v1(111.06,29.72) v1(111.06,28.45) v1(111.06,27.18) v1(111.06,25.91) v1(111.06,24.64) v1(111.06,23.37) v1(111.06,22.1) v1(111.06,20.83) v1(111.06,19.56) v1(111.06,18.29) v1(111.25,97.79) v1(111.51,93.98) v1(111.76,90.17) v1(111.76,86.61) v1(111.76,83.06) v1(111.76,14.48) v1(111.76,10.67) v1(112.01,97.03) v1(112.27,93.22) v1(112.52,89.41) v1(112.52,85.85) v1(112.52,82.3) v1(112.78,96.27) v1(112.78,15.49) v1(112.78,11.68) v1(113.03,92.46) v1(112.97,80.52) v1(112.97,79.25) v1(112.97,77.98) v1(112.97,76.71) v1(112.97,75.44) v1(112.97,74.17) v1(112.97,72.9) v1(112.97,71.63) v1(112.97,70.36) v1(112.97,69.09) v1(112.97,67.82) v1(112.97,66.55) v1(112.97,65.28) v1(112.97,64.01) v1(112.97,62.74) v1(112.97,61.47) v1(112.97,60.2) v1(112.97,58.93) v1(112.97,57.66) v1(112.97,56.39) v1(112.97,55.12) v1(112.97,53.85) v1(112.97,52.58) v1(112.97,51.31) v1(112.97,50.04) v1(112.97,48.77) v1(112.97,47.5) v1(112.97,46.23) v1(112.97,44.96) v1(112.97,43.69) v1(112.97,42.42) v1(112.97,41.15) v1(112.97,39.88) v1(112.97,38.61) v1(112.97,37.34) v1(112.97,36.07) v1(112.97,34.8) v1(112.97,33.53) v1(112.97,32.26) v1(112.97,30.99) v1(112.97,29.72) v1(112.97,28.45) v1(112.97,27.18) v1(112.97,25.91) v1(112.97,24.64) v1(112.97,23.37) v1(112.97,22.1) v1(112.97,20.83) v1(112.97,19.56) v1(112.97,18.29) v1(112.97,17.02) v1(113.28,88.65) v1(113.28,85.09) v1(113.28,81.53) v1(113.54,95.5) v1(113.54,8.64) v1(113.79,91.69) v1(113.79,12.7) v1(114.05,87.88) v1(114.05,84.33) v1(114.11,80.77) v1(114.11,79.5) v1(114.11,78.23) v1(114.11,76.96) v1(114.11,75.69) v1(114.11,74.42) v1(114.11,73.15) v1(114.11,71.88) v1(114.11,70.61) v1(114.11,69.34) v1(114.11,68.07) v1(114.11,66.8) v1(114.11,65.53) v1(114.11,64.26) v1(114.11,62.99) v1(114.11,61.72) v1(114.11,60.45) v1(114.11,59.18) v1(114.11,57.91) v1(114.11,56.64) v1(114.11,55.37) v1(114.11,54.1) v1(114.11,52.83) v1(114.11,51.56) v1(114.11,50.29) v1(114.11,49.02) v1(114.11,47.75) v1(114.11,46.48) v1(114.11,45.21) v1(114.11,43.94) v1(114.11,42.67) v1(114.11,41.4) v1(114.11,40.13) v1(114.11,38.86) v1(114.11,37.59) v1(114.11,36.32) v1(114.11,35.05) v1(114.11,33.78) v1(114.11,32.51) v1(114.11,31.24) v1(114.11,29.97) v1(114.11,28.7) v1(114.11,27.43) v1(114.11,26.16) v1(114.11,24.89) v1(114.11,23.62) v1(114.11,22.35) v1(114.11,21.08) v1(114.11,19.81) v1(114.11,18.54) v1(114.11,17.27) v1(114.3,94.74) v1(114.55,90.93) v1(114.55,9.65) v1(114.81,87.12) v1(114.81,83.57) v1(114.81,13.72) v1(115.06,93.98) v1(115.32,90.17) v1(115.57,86.36) v1(115.57,82.8) v1(115.57,10.67) v1(115.82,93.22) v1(115.82,14.73) v1(116.02,80.77) v1(116.02,79.5) v1(116.02,78.23) v1(116.02,76.96) v1(116.02,75.69) v1(116.02,74.42) v1(116.02,73.15) v1(116.02,71.88) v1(116.02,70.61) v1(116.02,69.34) v1(116.02,68.07) v1(116.02,66.8) v1(116.02,65.53) v1(116.02,64.26) v1(116.02,62.99) v1(116.02,61.72) v1(116.02,60.45) v1(116.02,59.18) v1(116.02,57.91) v1(116.02,56.64) v1(116.02,55.37) v1(116.02,54.1) v1(116.02,52.83) v1(116.02,51.56) v1(116.02,50.29) v1(116.02,49.02) v1(116.02,47.75) v1(116.02,46.48) v1(116.02,45.21) v1(116.02,43.94) v1(116.02,42.67) v1(116.02,41.4) v1(116.02,40.13) v1(116.02,38.86) v1(116.02,37.59) v1(116.02,36.32) v1(116.02,35.05) v1(116.02,33.78) v1(116.02,32.51) v1(116.02,31.24) v1(116.02,29.97) v1(116.02,28.7) v1(116.02,27.43) v1(116.02,26.16) v1(116.02,24.89) v1(116.02,23.62) v1(116.02,22.35) v1(116.02,21.08) v1(116.02,19.81) v1(116.02,18.54) v1(116.02,17.27) v1(116.02,16) v1(116.08,89.41) v1(116.33,85.6) v1(116.59,92.46) v1(116.59,11.68) v1(116.59,8.13) v1(116.84,88.65) v1(117.09,84.84) v1(117.15,81.28) v1(117.15,80.01) v1(117.15,78.74) v1(117.15,77.47) v1(117.15,76.2) v1(117.15,74.93) v1(117.15,73.66) v1(117.15,72.39) v1(117.15,71.12) v1(117.15,69.85) v1(117.15,68.58) v1(117.15,67.31) v1(117.15,66.04) v1(117.15,64.77) v1(117.15,63.5) v1(117.15,62.23) v1(117.15,60.96) v1(117.15,59.69) v1(117.15,58.42) v1(117.15,57.15) v1(117.15,55.88) v1(117.15,54.61) v1(117.15,53.34) v1(117.15,52.07) v1(117.15,50.8) v1(117.15,49.53) v1(117.15,48.26) v1(117.15,46.99) v1(117.15,45.72) v1(117.15,44.45) v1(117.15,43.18) v1(117.15,41.91) v1(117.15,40.64) v1(117.15,39.37) v1(117.15,38.1) v1(117.15,36.83) v1(117.15,35.56) v1(117.15,34.29) v1(117.15,33.02) v1(117.15,31.75) v1(117.15,30.48) v1(117.15,29.21) v1(117.15,27.94) v1(117.15,26.67) v1(117.15,25.4) v1(117.15,24.13) v1(117.15,22.86) v1(117.15,21.59) v1(117.15,20.32) v1(117.15,19.05) v1(117.15,17.78) v1(117.15,16.51) v1(117.35,91.69) v1(117.35,5.33) v1(117.6,87.88) v1(117.6,12.7) v1(117.6,9.14) v1(117.86,84.07) v1(118.11,90.93) v1(118.36,87.12) v1(118.36,6.35) v1(118.62,83.31) v1(118.62,13.72) v1(118.62,10.16) v1(118.87,90.17) v1(119.13,86.36) v1(119.07,81.28) v1(119.07,80.01) v1(119.07,78.74) v1(119.07,77.47) v1(119.07,76.2) v1(119.07,74.93) v1(119.07,73.66) v1(119.07,72.39) v1(119.07,71.12) v1(119.07,69.85) v1(119.07,68.58) v1(119.07,67.31) v1(119.07,66.04) v1(119.07,64.77) v1(119.07,63.5) v1(119.07,62.23) v1(119.07,60.96) v1(119.07,59.69) v1(119.07,58.42) v1(119.07,57.15) v1(119.07,55.88) v1(119.07,54.61) v1(119.07,53.34) v1(119.07,52.07) v1(119.07,50.8) v1(119.07,49.53) v1(119.07,48.26) v1(119.07,46.99) v1(119.07,45.72) v1(119.07,44.45) v1(119.07,43.18) v1(119.07,41.91) v1(119.07,40.64) v1(119.07,39.37) v1(119.07,38.1) v1(119.07,36.83) v1(119.07,35.56) v1(119.07,34.29) v1(119.07,33.02) v1(119.07,31.75) v1(119.07,30.48) v1(119.07,29.21) v1(119.07,27.94) v1(119.07,26.67) v1(119.07,25.4) v1(119.07,24.13) v1(119.07,22.86) v1(119.07,21.59) v1(119.07,20.32) v1(119.07,19.05) v1(119.07,17.78) v1(119.07,16.51) v1(119.07,15.24) v1(119.38,82.55) v1(119.38,7.37) v1(119.63,89.41) v1(119.63,11.18) v1(119.89,85.6) v1(120.2,81.79) v1(120.2,80.52) v1(120.2,79.25) v1(120.2,77.98) v1(120.2,76.71) v1(120.2,75.44) v1(120.2,74.17) v1(120.2,72.9) v1(120.2,71.63) v1(120.2,70.36) v1(120.2,69.09) v1(120.2,67.82) v1(120.2,66.55) v1(120.2,65.28) v1(120.2,64.01) v1(120.2,62.74) v1(120.2,61.47) v1(120.2,60.2) v1(120.2,58.93) v1(120.2,57.66) v1(120.2,56.39) v1(120.2,55.12) v1(120.2,53.85) v1(120.2,52.58) v1(120.2,51.31) v1(120.2,50.04) v1(120.2,48.77) v1(120.2,47.5) v1(120.2,46.23) v1(120.2,44.96) v1(120.2,43.69) v1(120.2,42.42) v1(120.2,41.15) v1(120.2,39.88) v1(120.2,38.61) v1(120.2,37.34) v1(120.2,36.07) v1(120.2,34.8) v1(120.2,33.53) v1(120.2,32.26) v1(120.2,30.99) v1(120.2,29.72) v1(120.2,28.45) v1(120.2,27.18) v1(120.2,25.91) v1(120.2,24.64) v1(120.2,23.37) v1(120.2,22.1) v1(120.2,20.83) v1(120.2,19.56) v1(120.2,18.29) v1(120.2,17.02) v1(120.2,15.75) v1(120.4,88.65) v1(120.4,8.38) v1(120.65,84.84) v1(120.65,12.19) v1(121.16,87.88) v1(121.41,9.4) v1(121.67,83.82) v1(121.67,13.21) v1(121.92,87.12) v1(122.11,83.06) v1(122.11,81.79) v1(122.11,80.52) v1(122.11,79.25) v1(122.11,77.98) v1(122.11,76.71) v1(122.11,75.44) v1(122.11,74.17) v1(122.11,72.9) v1(122.11,71.63) v1(122.11,70.36) v1(122.11,69.09) v1(122.11,67.82) v1(122.11,66.55) v1(122.11,65.28) v1(122.11,64.01) v1(122.11,62.74) v1(122.11,61.47) v1(122.11,60.2) v1(122.11,58.93) v1(122.11,57.66) v1(122.11,56.39) v1(122.11,55.12) v1(122.11,53.85) v1(122.11,52.58) v1(122.11,51.31) v1(122.11,50.04) v1(122.11,48.77) v1(122.11,47.5) v1(122.11,46.23) v1(122.11,44.96) v1(122.11,43.69) v1(122.11,42.42) v1(122.11,41.15) v1(122.11,39.88) v1(122.11,38.61) v1(122.11,37.34) v1(122.11,36.07) v1(122.11,34.8) v1(122.11,33.53) v1(122.11,32.26) v1(122.11,30.99) v1(122.11,29.72) v1(122.11,28.45) v1(122.11,27.18) v1(122.11,25.91) v1(122.11,24.64) v1(122.11,23.37) v1(122.11,22.1) v1(122.11,20.83) v1(122.11,19.56) v1(122.11,18.29) v1(122.11,17.02) v1(122.11,15.75) v1(122.11,14.48) v1(122.43,10.41) v1(122.68,86.36) v1(123.25,82.55) v1(123.25,81.28) v1(123.25,80.01) v1(123.25,78.74) v1(123.25,77.47) v1(123.25,76.2) v1(123.25,74.93) v1(123.25,73.66) v1(123.25,72.39) v1(123.25,71.12) v1(123.25,69.85) v1(123.25,68.58) v1(123.25,67.31) v1(123.25,66.04) v1(123.25,64.77) v1(123.25,63.5) v1(123.25,62.23) v1(123.25,60.96) v1(123.25,59.69) v1(123.25,58.42) v1(123.25,57.15) v1(123.25,55.88) v1(123.25,54.61) v1(123.25,53.34) v1(123.25,52.07) v1(123.25,50.8) v1(123.25,49.53) v1(123.25,48.26) v1(123.25,46.99) v1(123.25,45.72) v1(123.25,44.45) v1(123.25,43.18) v1(123.25,41.91) v1(123.25,40.64) v1(123.25,39.37) v1(123.25,38.1) v1(123.25,36.83) v1(123.25,35.56) v1(123.25,34.29) v1(123.25,33.02) v1(123.25,31.75) v1(123.25,30.48) v1(123.25,29.21) v1(123.25,27.94) v1(123.25,26.67) v1(123.25,25.4) v1(123.25,24.13) v1(123.25,22.86) v1(123.25,21.59) v1(123.25,20.32) v1(123.25,19.05) v1(123.25,17.78) v1(123.25,16.51) v1(123.25,15.24) v1(123.44,85.6) v1(123.44,11.43) v1(124.46,84.58) v1(124.46,12.45) v1(125.16,83.82) v1(125.16,82.55) v1(125.16,81.28) v1(125.16,80.01) v1(125.16,78.74) v1(125.16,77.47) v1(125.16,76.2) v1(125.16,74.93) v1(125.16,73.66) v1(125.16,72.39) v1(125.16,71.12) v1(125.16,69.85) v1(125.16,68.58) v1(125.16,67.31) v1(125.16,66.04) v1(125.16,64.77) v1(125.16,63.5) v1(125.16,62.23) v1(125.16,60.96) v1(125.16,59.69) v1(125.16,58.42) v1(125.16,57.15) v1(125.16,55.88) v1(125.16,54.61) v1(125.16,53.34) v1(125.16,52.07) v1(125.16,50.8) v1(125.16,49.53) v1(125.16,48.26) v1(125.16,46.99) v1(125.16,45.72) v1(125.16,44.45) v1(125.16,43.18) v1(125.16,41.91) v1(125.16,40.64) v1(125.16,39.37) v1(125.16,38.1) v1(125.16,36.83) v1(125.16,35.56) v1(125.16,34.29) v1(125.16,33.02) v1(125.16,31.75) v1(125.16,30.48) v1(125.16,29.21) v1(125.16,27.94) v1(125.16,26.67) v1(125.16,25.4) v1(125.16,24.13) v1(125.16,22.86) v1(125.16,21.59) v1(125.16,20.32) v1(125.16,19.05) v1(125.16,17.78) v1(125.16,16.51) v1(125.16,15.24) v1(125.16,13.97)
